# EAGLE board Schmatic (EAGLE 9.5.0), part 1 of 2
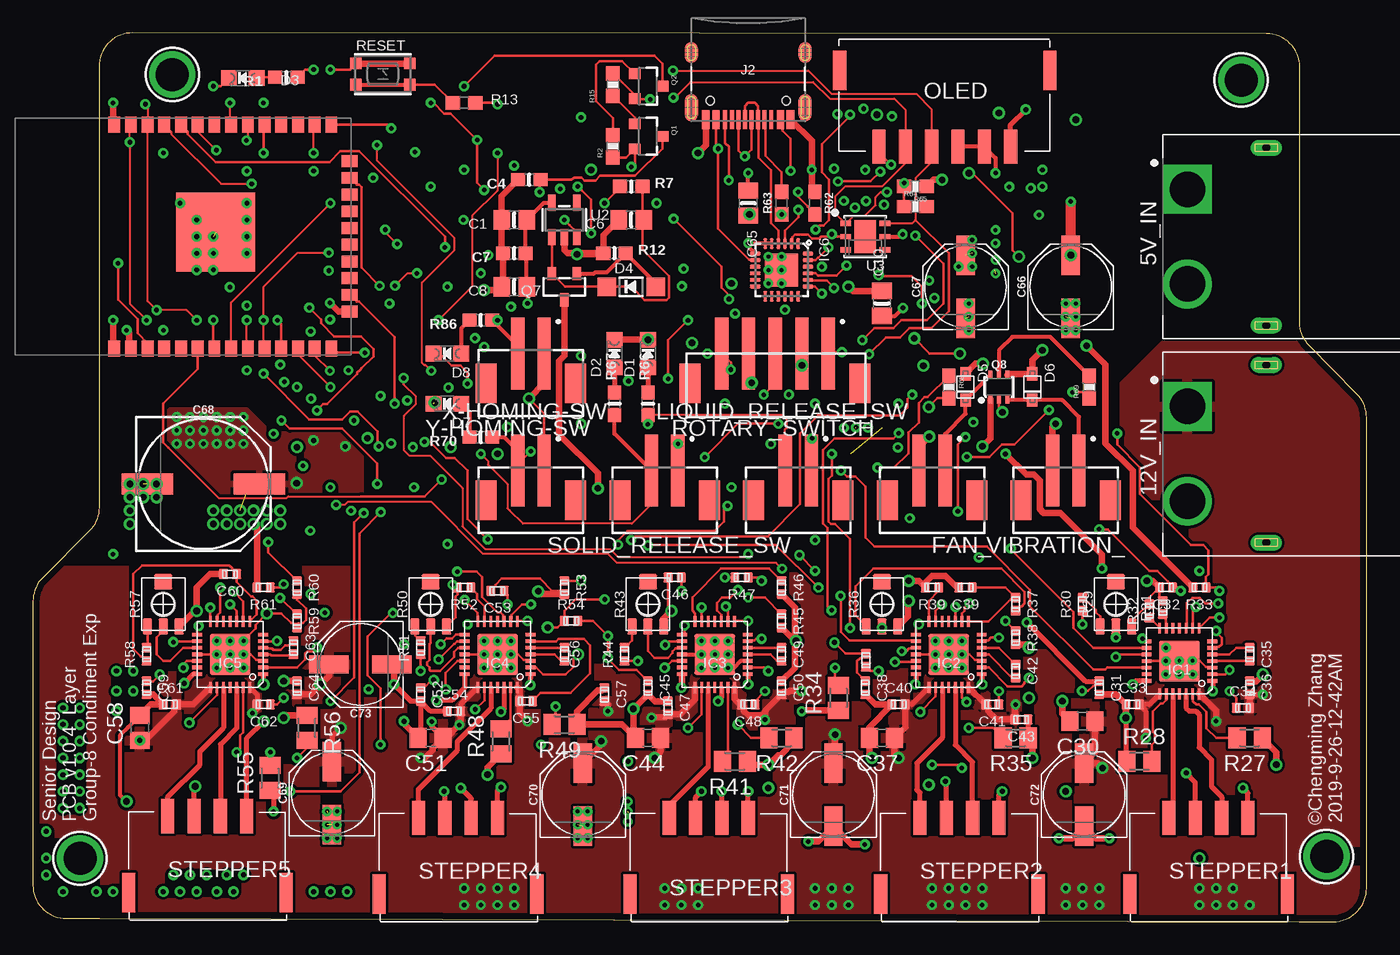
[diagram p0: board, top side]
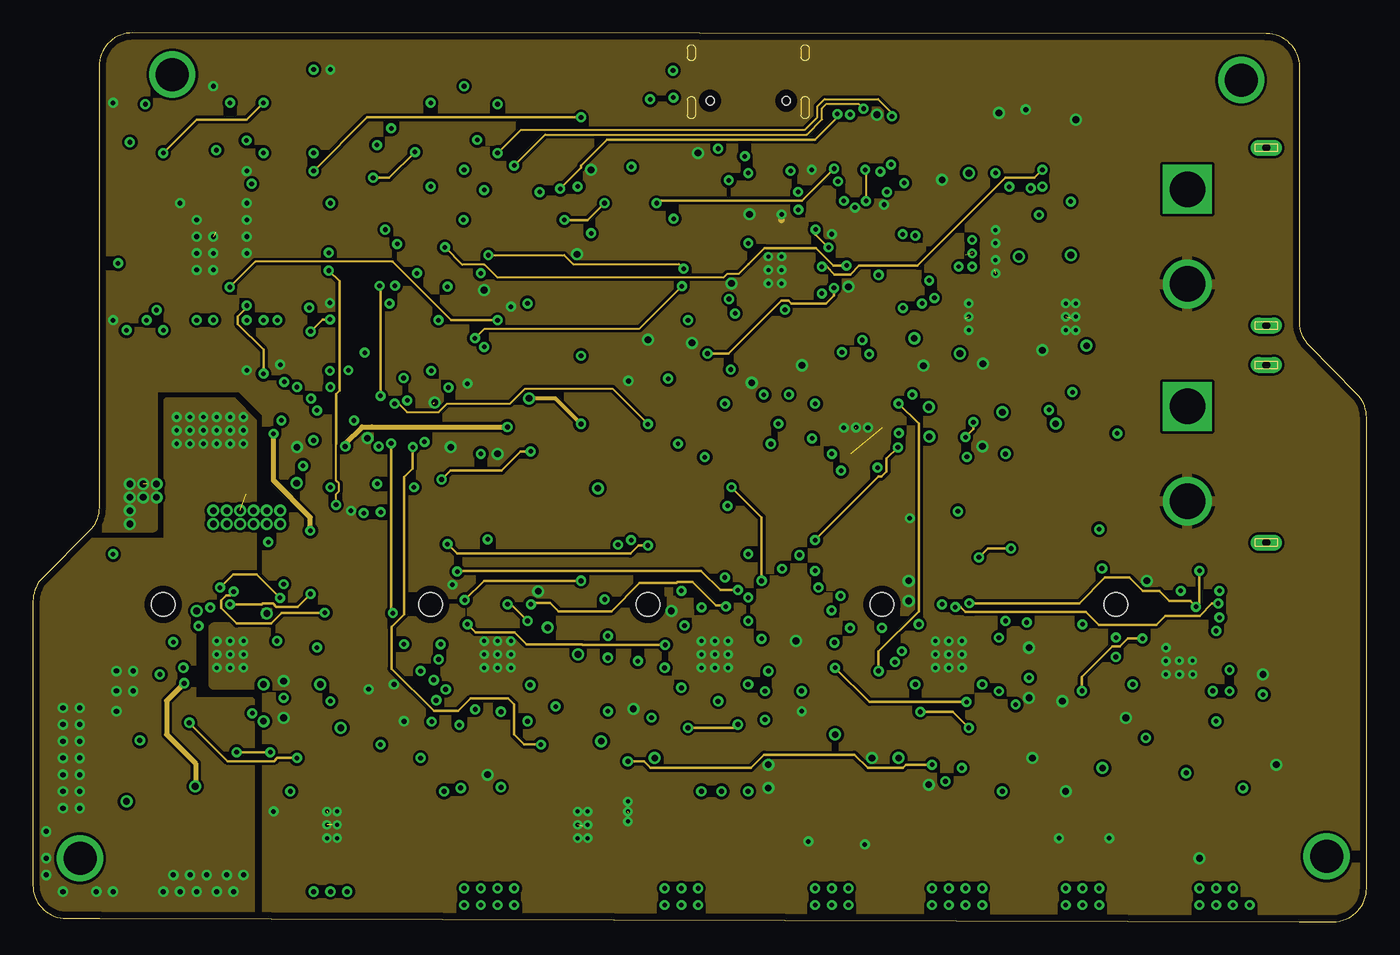
[diagram p1: board, inner layer GND]
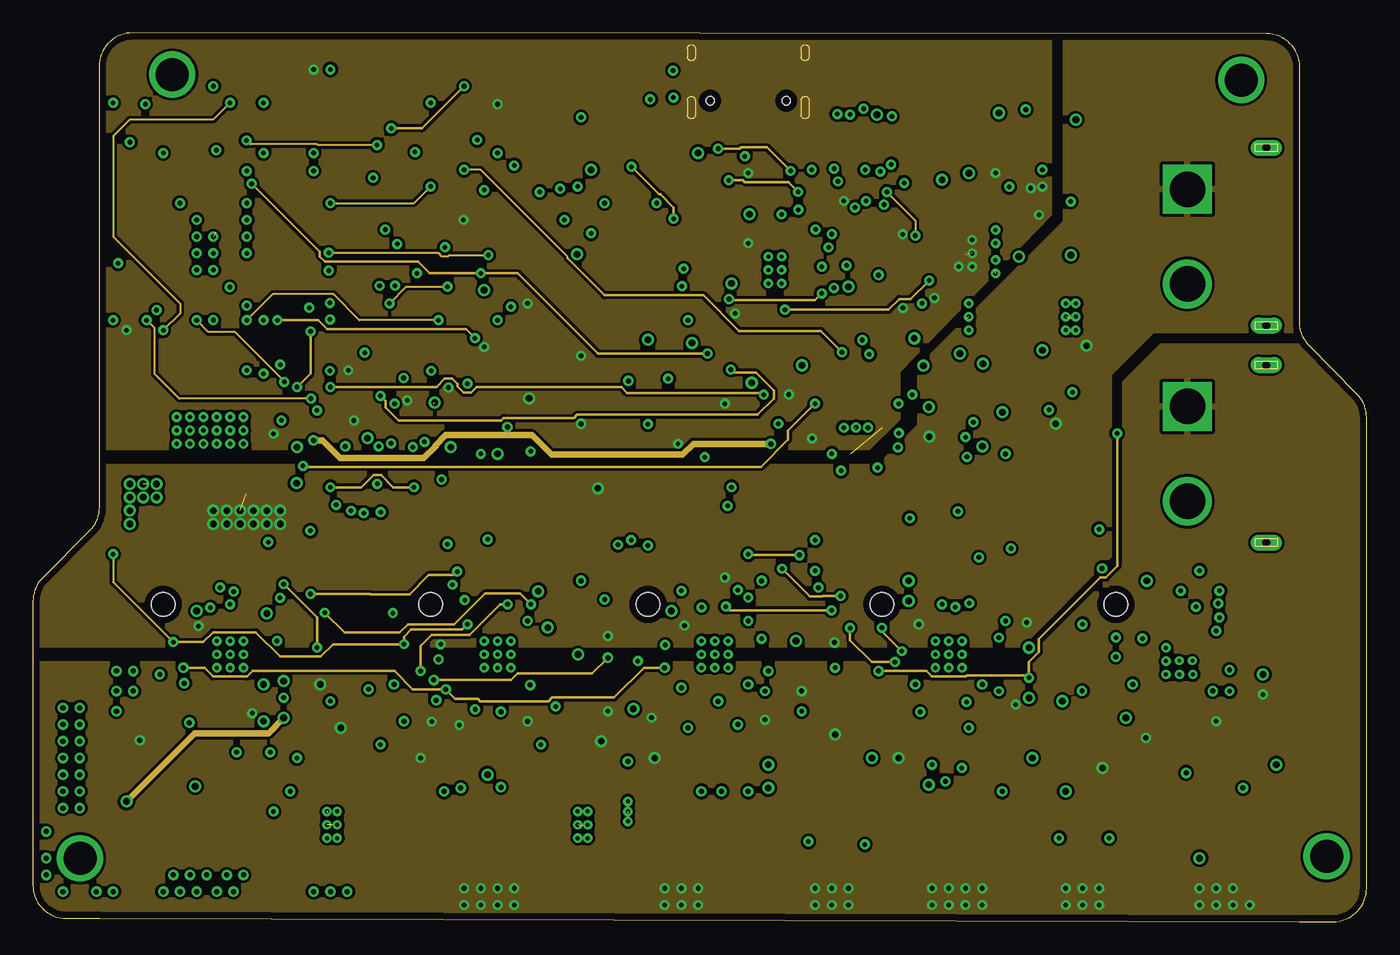
[diagram p2: board, inner layer Vref]
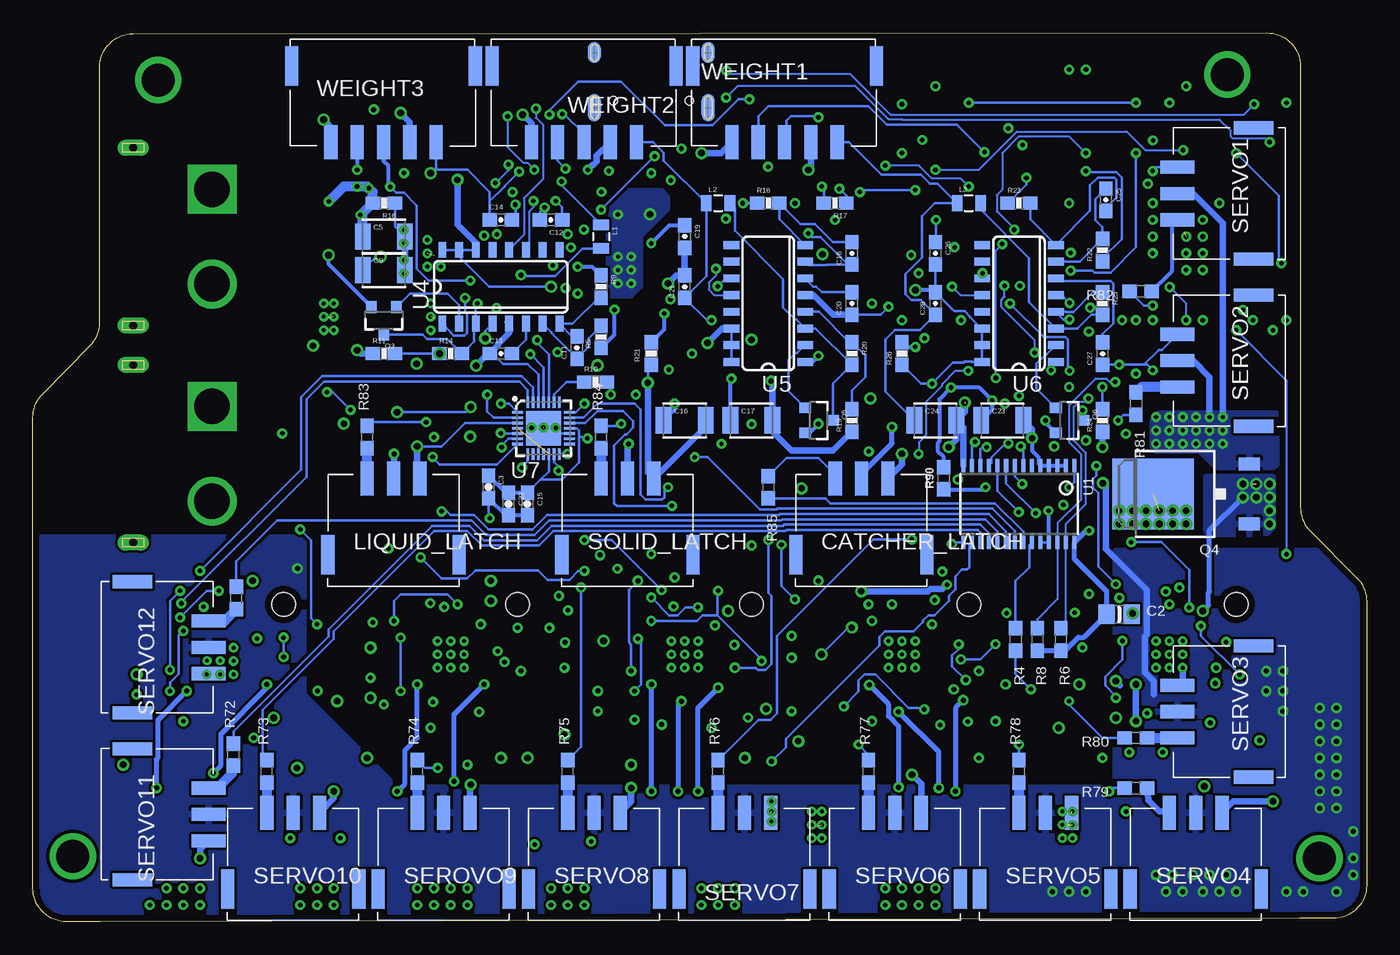
[diagram p3: board, bottom side, seen from below]

Size 101.35 x 67.55 mm. Coordinates in mm from the lower left corner, seen from the top.
Outline: 5.08,0.25 96.25,0 98.81,0 arc90 101.35,2.54 101.35,38.33 arc45 100.62,40.11 97,43.79 arc-43 96.27,45.52 96.27,45.55 96.29,59.69 96.27,64.96 arc90 93.73,67.49 7.57,67.55 arc90 5.03,65.01 5.03,31.47 arc-45 4.28,29.69 0.74,26.14 arc45 0,24.35 0,2.79 arc90 2.54,0.25 5.08,0.25
Copper layers (1+2*15+16): Top 0.035mm / dielectric 1.5mm / GND 0.035mm / dielectric 0.15mm / Vref 0.035mm / dielectric 0.2mm / Bottom 0.035mm
Design rules "default *": minimum track width 6mil, minimum drill 0.35mm, track to track 6mil, track to pad 6mil, pad to pad 6mil, via to via 6mil, smd to smd 6mil, copper to edge 20mil, drill to drill 6mil, minimum pad ring 10mil, minimum via ring 8mil, stop-mask expansion 4mil, vias tented up to drill 0mil, thermal gap 10mil
Net classes: 0 default: width 0.203 mm, drill 0.203 mm, clearance 0.203 mm; 1 sig: width 0.305 mm, drill 0.305 mm, clearance 0.203 mm; 2 Power: width 0.203 mm, drill 0.203 mm, clearance 0.203 mm; 3 HighSpeedSig: width 0.152 mm, drill 0.152 mm, clearance 0.203 mm; 4 StepperOut: width 0.381 mm, drill 0.381 mm, clearance 0.203 mm; 5 LowPower: width 0.203 mm, drill 0.203 mm, clearance 0.203 mm

## Footprints (pad centres in the part's own frame; a part is rotated, then mirrored left to right if it is on the bottom)
AMASS_XT60PW-M = drill 2.7 square: 1 -3.6,-6 | drill 2.7: 2 3.6,-6 | drill 0.6 pad 1.2 long: S1 -6.75,0; S2 6.75,0
0805-NO = smd 1.24 x 1.5: 1 -0.95,0; 2 0.95,0
0603-CAP = smd 1.1 x 1: 1 -0.85,0; 2 0.85,0
0603-NO = smd 1.075 x 1: 1 -0.85,0; 2 0.85,0
1210 = smd 1.2 x 2: 1 -1.6,0; 2 1.6,0
0603-CAP@1 = smd 1.1 x 1: 1 -0.85,0; 2 0.85,0
C0805 = smd 1.3 x 1.5: 1 -0.95,0; 2 0.95,0
C0402 = smd 0.75 x 0.7: 1 0,0.5; 2 0,-0.5
PANASONIC_D = smd 3 x 1.4: + 2.4,0; - -2.4,0
PANASONIC_G = smd 3.9 x 1.6: + 4.25,0; - -4.25,0
S3B-PH-SM4_TB = smd 1 x 2.6: 1 3.81,8.28; 2 5.81,8.28; 3 7.81,8.28 | smd 1 x 3: GND 0.826,2.48; GND2 10.794,2.48
CHIPLED_0805_NOOUTLINE = smd 1.2 x 1.2: A 0,-1.05; C 0,1.05
SOD-123 = smd 1.4 x 1.4: A 1.85,0; C -1.85,0
SOD-323F = smd 1 x 0.8: A -1,0; C 1,0
JST_B2B-PH-SM4-TB(LF)(SN) = smd 1 x 5.5: 1 -1,0; 2 1,0 | smd 1.6 x 3: 3 -3.4,2.25; 4 3.4,2.25
QFN28-PAD = smd 0.8 x 0.26: 1 -2.5,1.5; 2 -2.5,1; 3 -2.5,0.5; 4 -2.5,0; 5 -2.5,-0.5; 6 -2.5,-1; 7 -2.5,-1.5; 15 2.5,-1.5; 16 2.5,-1; 17 2.5,-0.5; 18 2.5,0; 19 2.5,0.5; 20 2.5,1; 21 2.5,1.5 | smd 0.26 x 0.8: 8 -1.5,-2.5; 9 -1,-2.5; 10 -0.5,-2.5; 11 0,-2.5; 12 0.5,-2.5; 13 1,-2.5; 14 1.5,-2.5; 22 1.5,2.5; 23 1,2.5; 24 0.5,2.5; 25 0,2.5; 26 -0.5,2.5; 27 -1,2.5; 28 -1.5,2.5 | smd 3.1 x 3.1: TP 0,0
QFN24_4MM_SMSC = smd 0.8 x 0.28: 1 -2,1.25; 2 -2,0.75; 3 -2,0.25; 4 -2,-0.25; 5 -2,-0.75; 6 -2,-1.25; 13 2,-1.25; 14 2,-0.75; 15 2,-0.25; 16 2,0.25; 17 2,0.75; 18 2,1.25 | smd 0.28 x 0.8: 7 -1.25,-2; 8 -0.75,-2; 9 -0.25,-2; 10 0.25,-2; 11 0.75,-2; 12 1.25,-2; 19 1.25,2; 20 0.75,2; 21 0.25,2; 22 -0.25,2; 23 -0.75,2; 24 -1.25,2 | smd 2.5 x 2.5: THERM 0,0
USB-C-16P = smd 0.3 x 1.45: A5 -1.25,0; A6 -0.25,0; A7 0.25,0; A8 1.25,0; B5 1.75,0; B6 0.75,0; B7 -0.75,0; B8 -1.75,0 | smd 0.6 x 1.45: GND -3.225,0; GND2 3.225,0 | smd 1 x 2.1: SHLD1 -4.32,-0.915; SHLD2 4.32,-0.915 | smd 1 x 2.1 bottom: SHLD3 -4.32,-0.915; SHLD4 4.32,-0.915 | smd 1 x 1.6: SHLD5 -4.32,-5.095; SHLD8 4.32,-5.095 | smd 1 x 1.6 bottom: SHLD6 -4.32,-5.095; SHLD7 4.32,-5.095 | smd 0.55 x 1.45: VBUS1 -2.45,0; VBUS2 2.45,0 | hole 0.65: -2.89,-1.445; 2.89,-1.445
0805 = smd 0.8 x 1.2: 1 -0.9,0; 2 0.9,0
S6B-PH-SM4_TB = smd 1 x 2.6: 1 5.46,9.68; 2 7.46,9.68; 3 9.46,9.68; 4 11.46,9.68; 5 13.46,9.68; 6 15.46,9.68 | smd 1 x 3: GND 2.476,3.88; GND2 18.444,3.88
SOT23-3 = smd 0.8 x 0.9: 1 -0.95,-1; 2 0.95,-1; 3 0,1.1
TO252 = smd 1 x 1.6: 1 -2.28,-4.8; 2 2.28,-4.8 | smd 5.4 x 6.2: 3 0,2.5
SOT23-R = smd 0.635 x 1.016: 1 -0.95,-1; 2 0.95,-1; 3 0,1
SC70-6 = smd 0.3 x 0.66: 1 -0.65,-0.92; 2 0,-0.92; 3 0.65,-0.92; 4 0.65,0.92; 5 0,0.92; 6 -0.65,0.92
0603-RES = smd 1.1 x 1: 1 -0.85,0; 2 0.85,0
0603 = smd 1.1 x 1: 1 -0.85,0; 2 0.85,0
0603-RES@1 = smd 1.1 x 1: 1 -0.85,0; 2 0.85,0
M0805 = smd 1.3 x 1.6: 1 -0.95,0; 2 0.95,0
POT_EVM3R = smd 0.7 x 1.2: 1 -1.2,-1.7; 2 0,-1.7; 3 1.2,-1.7 | smd 1.4 x 1.2: MOUNT 0,1.7 | hole 1.8: 0,0
BTN_KMR2_4.6X2.8 = smd 0.9 x 0.9: A 2.05,0.8; A' -2.05,0.8; B 2.05,-0.8; B' -2.05,-0.8
JST_B5B-PH-SM4-TB = smd 1 x 5.5: 1 4.08,3.81; 2 6.08,3.81; 5 8.112,3.81; 6 10.144,3.81; 7 12.176,3.81 | smd 1.6 x 3: 3 1.68,6.06; 4 14.576,6.06
S4B-PH-SM4_TB = smd 1 x 2.6: 1 3.27,7.9; 2 5.27,7.9; 3 7.27,7.9; 4 9.27,7.9 | smd 1 x 3: GND 0.286,2.1; GND2 12.254,2.1
TSSOP28 = smd 0.305 x 0.991: 1 -4.225,-2.918; 2 -3.575,-2.918; 3 -2.925,-2.918; 4 -2.275,-2.918; 5 -1.625,-2.918; 6 -0.975,-2.918; 7 -0.325,-2.918; 8 0.325,-2.918; 9 0.975,-2.918; 10 1.625,-2.918; 11 2.275,-2.918; 12 2.925,-2.918; 13 3.575,-2.918; 14 4.225,-2.918; 15 4.225,2.918; 16 3.575,2.918; 17 2.925,2.918; 18 2.275,2.918; 19 1.625,2.918; 20 0.975,2.918; 21 0.325,2.918; 22 -0.325,2.918; 23 -0.975,2.918; 24 -1.625,2.918; 25 -2.275,2.918; 26 -2.925,2.918; 27 -3.575,2.918; 28 -4.225,2.918
SOT23-5 = smd 0.55 x 1.2: 1 -0.95,-1.3; 2 0,-1.3; 3 0.95,-1.3; 4 0.95,1.3; 5 -0.95,1.3
HTU21DF = smd 0.8 x 0.4: 1 -1.5,1; 2 -1.5,0; 3 -1.5,-1; 4 1.5,-1; 5 1.5,0; 6 1.5,1 | smd 1.6 x 2.5: PAD 0,0
SO16 = smd 0.6 x 1.2: 1 -4.445,-2.8; 2 -3.175,-2.8; 3 -1.905,-2.8; 4 -0.635,-2.8; 5 0.635,-2.8; 6 1.905,-2.8; 7 3.175,-2.8; 8 4.445,-2.8; 9 4.445,2.8; 10 3.175,2.8; 11 1.905,2.8; 12 0.635,2.8; 13 -0.635,2.8; 14 -1.905,2.8; 15 -3.175,2.8; 16 -4.445,2.8
QFN-28 = smd 0.85 x 0.2: 1 -1.975,1.2; 2 -1.975,0.8; 3 -1.975,0.4; 4 -1.975,0; 5 -1.975,-0.4; 6 -1.975,-0.8; 7 -1.975,-1.2; 15 1.975,-1.2; 16 1.975,-0.8; 17 1.975,-0.4; 18 1.975,0; 19 1.975,0.4; 20 1.975,0.8; 21 1.975,1.2 | smd 0.2 x 0.85: 8 -1.2,-1.975; 9 -0.8,-1.975; 10 -0.4,-1.975; 11 0,-1.975; 12 0.4,-1.975; 13 0.8,-1.975; 14 1.2,-1.975; 22 1.2,1.975; 23 0.8,1.975; 24 0.4,1.975; 25 0,1.975; 26 -0.4,1.975; 27 -0.8,1.975; 28 -1.2,1.975 | smd 2.65 x 2.65: 29 0,0
MOUNTINGHOLE_2.5_PLATED = drill 2.5 pad 3.2: P$1 0,0
S5B-PH-SM4_TB = smd 1 x 2.6: 1 4.92,9.33; 2 6.92,9.33; 3 8.92,9.33; 4 10.92,9.33; 5 12.92,9.33 | smd 1 x 3: GND 1.936,3.53; GND2 15.904,3.53
WROOM32_SKINNY = smd 1.2 x 0.9: 1 -8.5,5; 2 -8.5,3.73; 3 -8.5,2.46; 4 -8.5,1.19; 5 -8.5,-0.08; 6 -8.5,-1.35; 7 -8.5,-2.62; 8 -8.5,-3.89; 9 -8.5,-5.16; 10 -8.5,-6.43; 11 -8.5,-7.7; 12 -8.5,-8.97; 13 -8.5,-10.24; 14 -8.5,-11.51; 25 8.5,-11.51; 26 8.5,-10.24; 27 8.5,-8.97; 28 8.5,-7.7; 29 8.5,-6.43; 30 8.5,-5.16; 31 8.5,-3.89; 32 8.5,-2.62; 33 8.5,-1.35; 34 8.5,-0.08; 35 8.5,1.19; 36 8.5,2.46; 37 8.5,3.73; 38 8.5,5 | smd 0.9 x 1.2: 15 -5.7,-12.9; 16 -4.43,-12.9; 17 -3.16,-12.9; 18 -1.89,-12.9; 19 -0.62,-12.9; 20 0.65,-12.9; 21 1.92,-12.9; 22 3.19,-12.9; 23 4.46,-12.9; 24 5.73,-12.9 | smd 6 x 6: P$1 0.34,-2.7

## Placement (x,y rotation side)
5V_IN  XT60PW-M  [AMASS_XT60PW-M]  93.73,52.07 270 top
12V_IN  XT60PW-M  [AMASS_XT60PW-M]  93.73,35.56 270 top
C1  10uF  [0805-NO]  36.58,53.34 180 top
C2  10uF  [0805-NO]  18.8,23.37 0 bottom
C3  0.1uF  [0603-CAP]  66.72,33.03 270 bottom
C4  1uF  [0603-NO]  37.72,56.39 180 top
C5  10uF  [1210]  74.68,52.07 0 bottom
C6  10µF  [0805-NO]  45.47,53.34 180 top
C7  1uF  [0603-NO]  36.58,50.8 180 top
C8  10µF  [0805-NO]  36.58,48.26 180 top
C9  10uF  [1210]  74.68,49.53 0 bottom
C10  0.1uF  [0805-NO]  64.52,46.99 90 top
C11  0.1uF  [0603-CAP@1]  60.01,43.63 90 bottom
C12  0.1uF  [0603-CAP@1]  61.98,53.34 180 bottom
C13  0.1uF  [0603-CAP@1]  65.79,43.18 0 bottom
C14  0.1uF  [0603-CAP@1]  65.79,53.34 0 bottom
C15  0.1uF  [0603-CAP]  63.77,31.75 270 bottom
C16  10uF  [1210]  51.82,38.1 0 bottom
C17  10uF  [1210]  46.74,38.1 0 bottom
C18  0.1uF  [0603-CAP@1]  39.12,50.8 90 bottom
C19  0.1uF  [0603-CAP@1]  51.82,52.07 270 bottom
C20  0.1uF  [0603-CAP@1]  39.12,46.99 90 bottom
C21  0.1uF  [0603-CAP@1]  51.82,48.26 90 bottom
C22  0.1uF  [0603-CAP]  65.21,31.76 270 bottom
C23  10uF  [1210]  27.69,38.1 0 bottom
C24  10uF  [1210]  32.77,38.1 0 bottom
C25  0.1uF  [0603-CAP@1]  19.81,54.86 270 bottom
C26  0.1uF  [0603-CAP@1]  32.77,50.8 270 bottom
C27  0.1uF  [0603-CAP@1]  20.07,43.18 90 bottom
C28  0.1uF  [0603-CAP@1]  32.77,46.99 90 bottom
C30  1u/50V  [C0805]  79.76,15.24 180 top
C31  100n/50V  [C0402]  81.03,17.78 180 top
C32  4u7/6V3  [C0402]  86.11,25.4 90 top
C33  100n/50V  [C0402]  83.57,16.51 270 top
C34  100n/50V  [C0402]  91.95,16.26 270 top
C35  22n/50V  [C0402]  92.46,20.32 180 top
C36  100n/50V  [C0402]  92.46,17.78 180 top
C37  1u/50V  [C0805]  64.52,13.97 180 top
C38  100n/50V  [C0402]  63.25,17.78 180 top
C39  4u7/6V3  [C0402]  70.87,25.4 90 top
C40  100n/50V  [C0402]  65.79,16.51 270 top
C41  100n/50V  [C0402]  72.9,16.51 90 top
C42  22n/50V  [C0402]  74.68,19.05 180 top
C43  100n/50V  [C0402]  75.1,15.36 90 top
C44  1u/50V  [C0805]  46.74,13.97 180 top
C45  100n/50V  [C0402]  46.74,17.78 180 top
C46  4u7/6V3  [C0402]  48.77,26.16 90 top
C47  100n/50V  [C0402]  48.26,16.26 180 top
C48  100n/50V  [C0402]  54.36,16.51 90 top
C49  22n/50V  [C0402]  56.9,20.32 180 top
C50  100n/50V  [C0402]  56.9,17.78 180 top
C51  1u/50V  [C0805]  30.23,13.97 180 top
C52  100n/50V  [C0402]  29.46,17.27 180 top
C53  4u7/6V3  [C0402]  35.31,25.15 90 top
C54  100n/50V  [C0402]  32,16 270 top
C55  100n/50V  [C0402]  37.47,16.76 90 top
C56  22n/50V  [C0402]  40.39,20.32 180 top
C57  100n/50V  [C0402]  43.43,17.27 180 top
C58  1u/50V  [C0805]  8.13,14.73 90 top
C59  100n/50V  [C0402]  8.64,17.78 180 top
C60  4u7/6V3  [C0402]  14.99,26.42 90 top
C61  100n/50V  [C0402]  10.41,16.51 270 top
C62  100n/50V  [C0402]  17.53,16.51 90 top
C63  22n/50V  [C0402]  19.81,20.83 180 top
C64  100n/50V  [C0402]  20.07,17.78 180 top
C65  10uF  [0805-NO]  54.36,54.61 270 top
C66  100uF  [PANASONIC_D]  78.87,48.26 90 top
C67  100uF  [PANASONIC_D]  70.87,48.26 90 top
C68  560uF  [PANASONIC_G]  12.95,33.27 0 top
C69  100uF  [PANASONIC_D]  22.73,9.78 90 top
C70  100uF  [PANASONIC_D]  41.78,9.65 90 top
C71  100uF  [PANASONIC_D]  60.83,9.65 90 top
C72  100uF  [PANASONIC_D]  79.88,9.65 90 top
C73  100uF  [PANASONIC_D]  24.89,19.56 180 top
CATCHER_LATCH  S3B-PH-SM4_TB  [S3B-PH-SM4_TB]  44.2,25.4 0 bottom
D1  RED  [CHIPLED_0805_NOOUTLINE]  46.74,43.18 0 top
D2  RED  [CHIPLED_0805_NOOUTLINE]  44.2,43.18 0 top
D3  POWER  [CHIPLED_0805_NOOUTLINE]  15.94,64.12 90 top
D4  MBR120  [SOD-123]  45.47,48.26 0 top
D5  [SOD-323F]  70.87,40.64 270 top
D6  [SOD-323F]  75.95,40.64 270 top
D7  RED  [CHIPLED_0805_NOOUTLINE]  31.5,39.37 90 top
D8  RED  [CHIPLED_0805_NOOUTLINE]  31.5,43.18 90 top
FAN_  B2B-PH-SM4-TB(LF)(SN)  [JST_B2B-PH-SM4-TB(LF)(SN)]  68.33,34.29 180 top
IC1  TMC2208  [QFN28-PAD]  87.12,19.81 180 top
IC2  TMC2208  [QFN28-PAD]  69.6,20.32 180 top
IC3  TMC2208  [QFN28-PAD]  51.82,20.32 180 top
IC4  TMC2208  [QFN28-PAD]  35.31,20.32 180 top
IC5  TMC2208  [QFN28-PAD]  14.99,20.32 180 top
IC6  CP2104  [QFN24_4MM_SMSC]  56.9,49.53 270 top
J2  [USB-C-16P]  54.36,60.96 180 top
L1  3.3uH  [0805]  58.17,52.07 270 bottom
L2  3.3uH  [0805]  49.28,54.61 0 bottom
L3  3.3uH  [0805]  30.23,54.61 0 bottom
LIQUID_LATCH  S3B-PH-SM4_TB  [S3B-PH-SM4_TB]  79.76,25.4 0 bottom
LIQUID_RELEASE_SW  B2B-PH-SM4-TB(LF)(SN)  [JST_B2B-PH-SM4-TB(LF)(SN)]  58.17,34.29 180 top
OLED  S6B-PH-SM4_TB  [S6B-PH-SM4_TB]  79.76,68.58 180 top
Q1  mmbt2222  [SOT23-3]  46.74,59.69 270 top
Q2  mmbt2222  [SOT23-3]  46.74,63.5 270 top
Q3  MMBT4403  [SOT23-3]  74.68,45.72 180 bottom
Q4  AOD417  [TO252]  13.72,32.51 90 bottom
Q5  MMBT4403  [SOT23-3]  41.66,38.1 270 bottom
Q6  MMBT4403  [SOT23-3]  22.61,38.1 270 bottom
Q7  DMG3415U  [SOT23-R]  40.39,48.26 180 top
Q8  [SC70-6]  73.41,40.64 0 top
R1  1K  [0603-NO]  19.26,64.18 180 top
R2  10K  [0603-RES]  44.07,58.93 90 top
R4  10k  [0603]  26.67,21.46 270 bottom
R5  100  [0603-RES@1]  58.17,44.45 90 bottom
R6  10k  [0603]  23.24,21.46 270 bottom
R7  100K  [0603-NO]  45.47,55.88 0 top
R8  10k  [0603]  25.02,21.46 270 bottom
R9  100  [0603-RES@1]  58.17,48.26 270 bottom
R10  10K  [0603-RES]  58.58,41.02 0 bottom
R11  8.2K  [0603-RES@1]  74.68,43.18 0 bottom
R12  100K  [0603-NO]  44.2,50.8 0 top
R13  10k  [0603]  32.77,62.23 0 top
R14  20k  [0603-RES@1]  69.6,43.18 0 bottom
R15  10K  [0603-RES]  44.07,63.63 270 top
R16  10K  [0603-RES]  74.68,54.61 180 bottom
R17  100  [0603-RES@1]  40.39,54.61 180 bottom
R18  100  [0603-RES@1]  45.47,54.61 0 bottom
R19  8.2K  [0603-RES@1]  39.12,38.1 90 bottom
R20  20k  [0603-RES@1]  39.12,43.18 270 bottom
R21  10K  [0603-RES]  54.36,43.18 90 bottom
R22  100  [0603-RES@1]  20.07,51.05 90 bottom
R23  100  [0603-RES@1]  26.42,54.61 0 bottom
R24  8.2K  [0603-RES@1]  20.07,38.1 90 bottom
R25  20k  [0603-RES@1]  20.07,46.99 270 bottom
R26  10K  [0603-RES]  35.31,43.18 90 bottom
R27  R0805/0R11  [M0805]  92.46,13.97 180 top
R28  R0805/0R11  [M0805]  84.07,12.19 0 top
R29  20k  [POT_EVM3R]  82.3,24.13 0 top
R30  20k  [C0402]  79.76,24.13 0 top
R31  20k  [C0402]  85.85,23.88 0 top
R32  20k  [C0402]  84.84,23.62 0 top
R33  20k  [C0402]  88.65,25.4 90 top
R34  R0805/0R11  [M0805]  61.21,17.02 90 top
R35  R0805/0R11  [M0805]  74.68,13.97 180 top
R36  20k  [POT_EVM3R]  64.52,24.13 0 top
R37  20k  [C0402]  74.68,24.13 180 top
R38  20k  [C0402]  74.68,21.59 180 top
R39  20k  [C0402]  68.33,25.4 90 top
R40  20k  [C0402]  63.3,19.88 0 top
R41  R0805/0R11  [M0805]  53.34,12.19 180 top
R42  R0805/0R11  [M0805]  56.9,13.97 180 top
R43  20k  [POT_EVM3R]  46.74,24.13 0 top
R44  20k  [C0402]  44.96,20.32 0 top
R45  20k  [C0402]  56.9,22.86 180 top
R46  20k  [C0402]  56.9,25.4 180 top
R47  20k  [C0402]  53.85,26.16 90 top
R48  R0805/0R11  [M0805]  35.56,13.72 90 top
R49  R0805/0R11  [M0805]  40.39,14.99 180 top
R50  20k  [POT_EVM3R]  30.23,24.13 0 top
R51  20k  [C0402]  29.46,20.83 0 top
R52  20k  [C0402]  32.77,25.4 90 top
R53  20k  [C0402]  40.39,25.4 180 top
R54  20k  [C0402]  40.89,22.86 270 top
R55  R0805/0R11  [M0805]  18.03,10.92 90 top
R56  R0805/0R11  [M0805]  20.83,14.73 270 top
R57  20k  [POT_EVM3R]  9.91,24.13 0 top
R58  20k  [C0402]  8.64,20.32 0 top
R59  20k  [C0402]  20.07,22.86 180 top
R60  20k  [C0402]  20.07,25.4 180 top
R61  20k  [C0402]  17.53,25.4 90 top
R62  5.1k  [0603]  59.44,54.61 270 top
R63  5.1k  [0603]  56.9,54.61 90 top
R64  10K  [0603-RES]  67.06,54.36 0 top
R65  10K  [0603-RES]  67.06,55.88 180 top
R66  1K  [0603-NO]  46.74,39.37 90 top
R67  1K  [0603-NO]  44.2,39.37 90 top
R68  10K  [0603-RES]  69.6,40.64 270 top
R69  10K  [0603-RES]  80.26,40.64 90 top
R70  1K  [0603-NO]  34.04,36.83 180 top
R71  22  [0603]  85.88,24.6 90 bottom
R72  22  [0603]  86.11,12.7 90 bottom
R73  22  [0603]  83.57,11.43 90 bottom
R74  22  [0603]  72.14,11.43 90 bottom
R75  22  [0603]  60.71,11.43 90 bottom
R76  22  [0603]  49.28,11.43 90 bottom
R77  22  [0603]  37.85,11.43 90 bottom
R78  22  [0603]  26.42,11.43 90 bottom
R79  22  [0603]  17.53,10.16 180 bottom
R80  22  [0603]  17.53,13.97 180 bottom
R81  22  [0603]  17.53,39.37 270 bottom
R82  22  [0603]  17.17,47.91 180 bottom
R83  22  [0603]  75.95,36.83 90 bottom
R84  22  [0603]  58.17,36.83 90 bottom
R85  22  [0603]  45.47,33.02 270 bottom
R86  1K  [0603-NO]  34.04,45.72 180 top
R90  10k  [0603]  32.13,33.71 90 bottom
RESET  KMR2  [BTN_KMR2_4.6X2.8]  26.59,64.42 0 top
ROTARY_SWITCH  B5B-PH-SM4-TB  [JST_B5B-PH-SM4-TB]  64.52,46.99 180 top
SEROVO9  S3B-PH-SM4_TB  [S3B-PH-SM4_TB]  75.95,0 0 bottom
SERVO1  S3B-PH-SM4_TB  [S3B-PH-SM4_TB]  6.1,49.53 90 bottom
SERVO2  S3B-PH-SM4_TB  [S3B-PH-SM4_TB]  6.1,36.83 90 bottom
SERVO3  S3B-PH-SM4_TB  [S3B-PH-SM4_TB]  6.1,10.16 90 bottom
SERVO4  S3B-PH-SM4_TB  [S3B-PH-SM4_TB]  18.8,0 0 bottom
SERVO5  S3B-PH-SM4_TB  [S3B-PH-SM4_TB]  30.23,0 0 bottom
SERVO6  S3B-PH-SM4_TB  [S3B-PH-SM4_TB]  41.66,0 0 bottom
SERVO7  S3B-PH-SM4_TB  [S3B-PH-SM4_TB]  53.09,0 0 bottom
SERVO8  S3B-PH-SM4_TB  [S3B-PH-SM4_TB]  64.52,0 0 bottom
SERVO10  S3B-PH-SM4_TB  [S3B-PH-SM4_TB]  87.38,0 0 bottom
SERVO11  S3B-PH-SM4_TB  [S3B-PH-SM4_TB]  96.27,13.97 270 bottom
SERVO12  S3B-PH-SM4_TB  [S3B-PH-SM4_TB]  96.27,26.67 270 bottom
SOLID_LATCH  S3B-PH-SM4_TB  [S3B-PH-SM4_TB]  61.98,25.4 0 bottom
SOLID_RELEASE_SW  B2B-PH-SM4-TB(LF)(SN)  [JST_B2B-PH-SM4-TB(LF)(SN)]  48.01,34.29 180 top
STEPPER1  S4B-PH-SM4_TB  [S4B-PH-SM4_TB]  83.06,0 0 top
STEPPER2  S4B-PH-SM4_TB  [S4B-PH-SM4_TB]  64.14,0 0 top
STEPPER3  S4B-PH-SM4_TB  [S4B-PH-SM4_TB]  45.08,0 0 top
STEPPER4  S4B-PH-SM4_TB  [S4B-PH-SM4_TB]  26.04,0 0 top
STEPPER5  S4B-PH-SM4_TB  [S4B-PH-SM4_TB]  6.99,0.13 0 top
U1  PCA9685  [TSSOP28]  26.42,31.75 180 bottom
U2  AP2112-3.3  [SOT23-5]  40.39,53.34 0 top
U3  HTU21DF  [HTU21DF]  63.25,52.07 180 top
U4  HX711  [SO16]  65.79,48.26 0 bottom
U5  HX711  [SO16]  45.47,46.99 90 bottom
U6  HX711  [SO16]  26.42,46.99 90 bottom
U7  SX1509  [QFN-28]  62.54,37.51 0 bottom
U$4  MOUNTINGHOLE2.5  [MOUNTINGHOLE_2.5_PLATED]  3.58,4.82 0 top
U$48  MOUNTINGHOLE2.5  [MOUNTINGHOLE_2.5_PLATED]  98.31,4.97 0 top
U$49  MOUNTINGHOLE2.5  [MOUNTINGHOLE_2.5_PLATED]  10.59,64.39 0 top
U$50  MOUNTINGHOLE2.5  [MOUNTINGHOLE_2.5_PLATED]  91.82,63.97 0 top
VIBRATION_  B2B-PH-SM4-TB(LF)(SN)  [JST_B2B-PH-SM4-TB(LF)(SN)]  78.49,34.29 180 top
WEIGHT1  S5B-PH-SM4_TB  [S5B-PH-SM4_TB]  35.31,68.58 180 bottom
WEIGHT2  S5B-PH-SM4_TB  [S5B-PH-SM4_TB]  50.55,68.58 180 bottom
WEIGHT3  S5B-PH-SM4_TB  [S5B-PH-SM4_TB]  65.79,68.58 180 bottom
X2  ESP32_WROOM32_SKINNY  [WROOM32_SKINNY]  11.18,52.07 90 top
X-HOMING-SW  B2B-PH-SM4-TB(LF)(SN)  [JST_B2B-PH-SM4-TB(LF)(SN)]  37.85,34.29 180 top
Y-HOMING-SW  B2B-PH-SM4-TB(LF)(SN)  [JST_B2B-PH-SM4-TB(LF)(SN)]  37.85,43.18 180 top

## Library data of the parts
5V_IN 12V_IN = XT60PW-M; AVAILABILITY: Unavailable; MF: AMASS; MP: XT60PW-M; PACKAGE: Package Analog Devices; PRICE: None
C1 C2 C4 C6-C8 C10 C65 D1-D4 D7 D8 IC6 Q4 Q7 R1 R7 R12 R66 R67 R70 R86 RESET U1-U3 X2 = microbuilder
C3 C15 C22 = SparkFun-Capacitors; PROD_ID: CAP-00810
C5 C9 C16 C17 C23 C24 = SparkFun-Capacitors; PROD_ID: CAP-09824
C11-C14 C18-C21 C25-C28 = SparkFun-Capacitors; PROD_ID: CAP-08604
C30 C37 C44 C51 C58 R27 R28 R34 R35 R41 R42 R48 R49 R55 R56 = rcl
C31-C36 C38-C43 C45-C50 C52-C57 C59-C64 R29-R33 R36-R40 R43-R47 R50-R54 R57-R61 = we-rcl
C66 C67 C69-C73 = SparkFun-Capacitors; PROD_ID: CAP-12547
C68 = SparkFun-Capacitors; PROD_ID: CAP-09983
CATCHER_LATCH LIQUID_LATCH OLED SEROVO9 SERVO1-SERVO8 SERVO10-SERVO12 SOLID_LATCH STEPPER1-STEPPER5 WEIGHT1-WEIGHT3 = NewKevinMade
D5 D6 = adafruit
FAN_ LIQUID_RELEASE_SW SOLID_RELEASE_SW VIBRATION_ X-HOMING-SW Y-HOMING-SW = B2B-PH-SM4-TB_LF__SN_; AVAILABILITY: Unavailable; DESCRIPTION: PH Series 2 Position 2 mm Pitch Surface Mount Top Entry Shrouded Header; MF: JST Sales; MP: B2B-PH-SM4-TB_LF__SN_; PACKAGE: None; PRICE: None
IC1-IC5 = we-chip
J2 = SparkFun-Connectors; PROD_ID: CONN-14122
L1-L3 = SparkFun-Passives; PROD_ID: NDUC-13076
Q1 Q2 = SparkFun
Q3 Q5 Q6 = SparkFun-DiscreteSemi; PROD_ID: TRANS-09245
Q8 = SparkFun-DiscreteSemi; PROD_ID: TRANS-13337
R2 R4 R6 R8 R10 R13 R15 R16 R21 R26 R64 R65 R68 R69 R90 = SparkFun-Resistors; PROD_ID: RES-00824
R5 R9 R17 R18 R22 R23 = SparkFun-Resistors; PROD_ID: RES-07863
R11 R19 R24 = SparkFun-Resistors; PROD_ID: RES-10646
R14 R20 R25 = SparkFun-Resistors; PROD_ID: RES-09383
R62 R63 = SparkFun-Resistors; PROD_ID: RES-12083
R71-R85 = SparkFun-Resistors; PROD_ID: RES-08698
ROTARY_SWITCH = B2B-PH-SM4-TB_LF__SN_
U4-U6 = Testing; PROD_ID: IC-12445
U7 = SparkFun-DigitalIC; PROD_ID: IC-11311
U$4 U$48-U$50 = microbuilder; BOM: EXCLUDE

## Nets
2RX [HighSpeedSig]: X2.27
2TX [HighSpeedSig]: X2.28
5V_REG [Power]: 5V_IN.1 C31.2 C38.2 C45.2 C52.2 C59.2 FAN_.2 IC1.15 IC2.15 IC3.15 IC4.15 IC5.15 Q4.3 Q7.3 R33.1 R40.1 R47.1 R54.1 R61.1 VIBRATION_.2
5V_SERVO [Power]: C68.+ CATCHER_LATCH.2 LIQUID_LATCH.2 Q4.2 SEROVO9.2 SERVO1.2 SERVO2.2 SERVO3.2 SERVO4.2 SERVO5.2 SERVO6.2 SERVO7.2 SERVO8.2 SERVO10.2 SERVO11.2 SERVO12.2 SOLID_LATCH.2
10: U7.15
11: U7.16
12V_REG [Power]: 12V_IN.1 C30.1 C33.1 C34.1 C36.1 C37.1 C40.1 C41.1 C43.1 C44.1 C47.1 C48.1 C50.1 C51.1 C54.1 C55.1 C57.1 C58.1 C61.1 C62.1 C64.1 C69.+ C70.+ C71.+ C72.+ C73.+ IC1.22 IC1.28 IC2.22 IC2.28 IC3.22 IC3.28 IC4.22 IC4.28 IC5.22 IC5.28
15: U7.22
!INT: U7.9
!RESET: R10.1 U7.23
A3_I39: X2.5
A4_IO36: X2.4
A+_1: R9.1 WEIGHT3.4
A+_2: R18.1 WEIGHT2.4
A+_3: R23.1 WEIGHT1.4
A-_1: R5.1 WEIGHT3.3
A-_2: R17.1 WEIGHT2.3
A-_3: R22.1 WEIGHT1.3
AVDD_1: C9.1 C14.1 L1.1 WEIGHT3.1
AVDD_2: C17.1 C21.1 L2.1 WEIGHT2.1
AVDD_3: C24.1 C28.1 L3.1 WEIGHT1.1
BRA: IC1.23 R28.2
BRA1: IC2.23 R35.2
BRA2: IC3.23 R42.2
BRA3: IC4.23 R49.2
BRA4: IC5.23 R56.2
BRB: IC1.27 R27.2
BRB1: IC2.27 R34.2
BRB2: IC3.27 R41.2
BRB3: IC4.27 R48.2
BRB4: IC5.27 R55.2
CC1: J2.A5 R63.2
CC2: J2.B5 R62.2
CLK_1: IC1.13 R31.2
CLK_2: IC2.13 R38.2
CLK_3: IC3.13 R45.2
CLK_4: IC4.13 R52.2
CLK_5: IC5.13 R59.2
CPI: C35.2 IC1.5
CPI1: C42.2 IC2.5
CPI2: C49.2 IC3.5
CPI3: C56.2 IC4.5
CPI4: C63.2 IC5.5
CPO: C35.1 IC1.4
CPO1: C42.1 IC2.4
CPO2: C49.1 IC3.4
CPO3: C56.1 IC4.4
CPO4: C63.1 IC5.4
DIR_1: IC1.19 U7.13
DIR_2: IC2.19 U7.14
DIR_LIQUID: IC3.19 IC4.19 IC5.19 U7.2
DTR: IC6.23 Q2.2 R15.1
EN: R7.1 U2.3
EN_LIQUID_1: IC3.2 R47.2 U7.20
EN_LIQUID_2: IC5.2 R61.2 U7.21
EN_LIQUID_3: IC4.2 R54.2 U7.19
EN_XY: IC1.2 IC2.2 R33.2 R40.2 U7.1
FAN: R68.1 U7.8
FAN_5V [LowPower]: D5.C FAN_.1 Q8.6
GND [Power]: 5V_IN.2 12V_IN.2 C1.2 C2.2 C3.2 C4.2 C5.2 C6.2 C7.2 C8.2 C9.2 C10.2 C12.2 C13.1 C14.2 C15.2 C16.2 C17.2 C19.2 C20.1 C21.2 C22.2 C23.2 C24.2 C26.2 C27.1 C28.2 C30.2 C31.1 C32.1 C33.2 C36.2 C37.2 C38.1 C39.1 C40.2 C43.2 C44.2 C45.1 C46.1 C47.2 C50.2 C51.2 C52.1 C53.1 C54.2 C57.2 C58.2 C59.1 C60.1 C61.2 C64.2 C65.2 C66.- C67.- C68.- C69.- C70.- C71.- C72.- C73.- CATCHER_LATCH.3 D1.C D2.C D3.C D5.A D6.A D7.C D8.C IC1.3 IC1.18 IC1.TP IC2.3 IC2.18 IC2.TP IC3.3 IC3.18 IC3.TP IC4.3 IC4.18 IC4.TP IC5.3 IC5.18 IC5.TP IC6.2 IC6.THERM J2.GND J2.GND2 LIQUID_LATCH.3 OLED.1 Q4.1 Q8.1 Q8.4 R4.2 R11.1 R12.1 R16.1 R19.1 R21.1 R24.1 R26.1 R27.1 R28.1 R29.3 R31.1 R32.1 R34.1 R35.1 R36.3 R38.1 R39.1 R41.1 R42.1 R43.3 R45.1 R46.1 R48.1 R49.1 R50.3 R52.1 R53.1 R55.1 R56.1 R57.3 R59.1 R60.1 R62.1 R63.1 R65.1 RESET.A RESET.A' ROTARY_SWITCH.2 ROTARY_SWITCH.6 SEROVO9.3 SERVO1.3 SERVO2.3 SERVO3.3 SERVO4.3 SERVO5.3 SERVO6.3 SERVO7.3 SERVO8.3 SERVO10.3 SERVO11.3 SERVO12.3 SOLID_LATCH.3 U1.2 U1.3 U1.4 U1.5 U1.14 U1.24 U1.25 U2.2 U3.5 U4.5 U4.14 U4.15 U4.16 U5.5 U5.14 U5.15 U5.16 U6.5 U6.14 U6.15 U6.16 U7.3 U7.10 U7.17 U7.26 U7.29 WEIGHT1.2 WEIGHT1.5 WEIGHT2.2 WEIGHT2.5 WEIGHT3.2 WEIGHT3.5 X2.1 X2.15 X2.38 X2.P$1
GPIO0: Q2.3 X2.25
GPIO2: X2.24
LRSW [HighSpeedSig]: LIQUID_RELEASE_SW.2 R66.1 X2.16
MS1_LIQUID: IC3.9 IC4.9 IC5.9 U7.5
MS1_SOLID: IC1.9 IC2.9 U7.27
MS2_LIQUID: IC3.10 IC4.10 IC5.10 U7.6
MS2_SOLID: IC1.10 IC2.10 U7.28
N$1: C13.2 U4.6
N$2: L1.2 Q3.3 R14.2 U4.3
N$3: Q5.1 U5.2
N$4: Q3.1 U4.2
N$5: D3.A R1.2
N$6: R11.2 R14.1 U4.4
N$7: C6.1 D4.C Q7.2 R7.2 U2.1
N$8: C11.1 R5.2 U4.7
N$9: C11.2 R9.2 U4.8
N$11: R19.2 R20.1 U5.4
N$12: Q1.1 R15.2
N$13: Q2.1 R2.2
N$14: C20.2 U5.6
N$15: L2.2 Q5.3 R20.2 U5.3
N$16: C18.1 R17.2 U5.7
N$17: C18.2 R18.2 U5.8
N$19: Q6.1 U6.2
N$20: R24.2 R25.1 U6.4
N$21: C27.2 U6.6
N$22: L3.2 Q6.3 R25.2 U6.3
N$23: C25.1 R22.2 U6.7
N$24: C25.2 R23.2 U6.8
N$26: IC6.8 J2.VBUS1 J2.VBUS2
N$27: IC6.3 J2.A6 J2.B6
N$28: IC6.4 J2.A7 J2.B7
N$30 [Power]: R90.1 U1.1
N$33 [sig]: D1.A R66.2
N$34: OLED.6 R64.1 R65.2
N$35: Q8.5 R69.2
N$36 [sig]: D2.A R67.2
N$37: Q8.2 R68.2
N$38: R71.2 U1.19
N$39: R72.2 U1.18
N$40: R73.2 U1.17
N$41: R74.2 U1.16
N$42: R75.2 U1.15
N$43: R76.2 U1.13
N$44: R77.2 U1.12
N$45: R78.2 U1.11
N$46: R79.2 U1.10
N$47: R80.2 U1.9
N$48: R81.2 U1.8
N$49: R82.2 U1.7
N$50: R83.2 U1.20
N$51: R84.2 U1.21
N$52: R85.2 U1.22
N$53 [sig]: D7.A R70.2
N$54: R13.1 RESET.B RESET.B'
N$55 [sig]: D8.A R86.2
OA1_1 [StepperOut]: IC1.24 STEPPER1.1
OA1_2 [StepperOut]: IC2.24 STEPPER2.1
OA1_3 [StepperOut]: IC3.24 STEPPER3.1
OA1_4 [StepperOut]: IC4.24 STEPPER4.1
OA1_5 [StepperOut]: IC5.24 STEPPER5.1
OA2_1 [StepperOut]: IC1.21 STEPPER1.2
OA2_2 [StepperOut]: IC2.21 STEPPER2.2
OA2_3 [StepperOut]: IC3.21 STEPPER3.2
OA2_4 [StepperOut]: IC4.21 STEPPER4.2
OA2_5 [StepperOut]: IC5.21 STEPPER5.2
OB1_1 [StepperOut]: IC1.26 STEPPER1.3
OB1_2 [StepperOut]: IC2.26 STEPPER2.3
OB1_3 [StepperOut]: IC3.26 STEPPER3.3
OB1_4 [StepperOut]: IC4.26 STEPPER4.3
OB1_5 [StepperOut]: IC5.26 STEPPER5.3
OB2_1 [StepperOut]: IC1.1 STEPPER1.4
OB2_2 [StepperOut]: IC2.1 STEPPER2.4
OB2_3 [StepperOut]: IC3.1 STEPPER3.4
OB2_4 [StepperOut]: IC4.1 STEPPER4.4
OB2_5 [StepperOut]: IC5.1 STEPPER5.4
OE: R4.1 U1.23
OLED_RST: R64.2
OSCIO: U7.11
PDN_UART_1: IC1.14 R32.2
PDN_UART_2: IC2.14 R39.2
PDN_UART_3: IC3.14 R46.2
PDN_UART_4: IC4.14 R53.2
PDN_UART_5: IC5.14 R60.2
PWM1: R82.1 SERVO1.1
PWM2: R81.1 SERVO2.1
PWM3: R80.1 SERVO3.1
PWM4: R79.1 SERVO4.1
PWM5: R78.1 SERVO5.1
PWM6: R77.1 SERVO6.1
PWM7: R76.1 SERVO7.1
PWM8: R75.1 SERVO8.1
PWM9: R74.1 SEROVO9.1
PWM10: R73.1 SERVO10.1
PWM11: R72.1 SERVO11.1
PWM12: R71.1 SERVO12.1
PWM13: LIQUID_LATCH.1 R83.1
PWM14: R84.1 SOLID_LATCH.1
PWM15: CATCHER_LATCH.1 R85.1
RESET: C4.1 Q1.3 X2.3
ROTA_A [HighSpeedSig]: ROTARY_SWITCH.1 X2.33
ROTA_C [HighSpeedSig]: ROTARY_SWITCH.5 X2.12
ROTA_E [HighSpeedSig]: ROTARY_SWITCH.7 X2.23
RTS: IC6.19 Q1.2 R2.1
RXD0 [HighSpeedSig]: IC6.21 X2.34
SCL [HighSpeedSig]: OLED.4 R8.1 U1.26 U3.3 U7.25 X2.36
SDA [HighSpeedSig]: OLED.5 R6.1 U1.27 U3.4 U7.24 X2.37
SRSW [HighSpeedSig]: R67.1 SOLID_RELEASE_SW.2 X2.30
STEP_1 [HighSpeedSig]: IC1.16 X2.26
STEP_2 [HighSpeedSig]: IC2.16 X2.29
STEP_LIQUID [HighSpeedSig]: IC3.16 IC4.16 IC5.16 X2.31
TRI_5V_1: C32.2 IC1.8 R30.2
TRI_5V_2: C39.2 IC2.8 R37.2
TRI_5V_3: C46.2 IC3.8 R44.2
TRI_5V_4: C53.2 IC4.8 R51.2
TRI_5V_5: C60.2 IC5.8 R58.2
TXD0 [HighSpeedSig]: IC6.20 X2.35
VBUS [LowPower]: D4.A Q7.1 R12.2
VCC [LowPower]: C1.1 C2.1 C3.1 C5.1 C7.1 C8.1 C10.1 C12.1 C15.1 C16.1 C19.1 C22.1 C23.1 C26.1 C65.1 C66.+ C67.+ IC6.5 IC6.6 IC6.7 LIQUID_RELEASE_SW.1 OLED.2 OLED.3 Q3.2 Q5.2 Q6.2 R1.1 R6.2 R8.2 R10.2 R13.2 R16.2 R21.2 R26.2 R90.2 SOLID_RELEASE_SW.1 U1.28 U2.5 U3.2 U4.1 U5.1 U6.1 U7.4 U7.12 U7.18 X2.2 X-HOMING-SW.1 Y-HOMING-SW.1
VCP: C34.2 IC1.6
VCP1: C41.2 IC2.6
VCP2: C48.2 IC3.6
VCP3: C55.2 IC4.6
VCP4: C62.2 IC5.6
VIB: R69.1 U7.7
VIB_5V [LowPower]: D6.C Q8.3 VIBRATION_.1
VREF: IC1.17 R29.2
VREF1: R29.1 R30.1
VREF2: IC2.17 R36.2
VREF3: R36.1 R37.1
VREF4: IC3.17 R43.2
VREF5: R43.1 R44.1
VREF6: IC4.17 R50.2
VREF7: R50.1 R51.1
VREF8: IC5.17 R57.2
VREF9: R57.1 R58.1
WEIGHT_CLK_1 [HighSpeedSig]: U4.11 X2.9
WEIGHT_CLK_2 [HighSpeedSig]: U5.11 X2.11
WEIGHT_CLK_3 [HighSpeedSig]: U6.11 X2.14
WEIGHT_DATA_1 [HighSpeedSig]: U4.12 X2.8
WEIGHT_DATA_2 [HighSpeedSig]: U5.12 X2.10
WEIGHT_DATA_3 [HighSpeedSig]: U6.12 X2.13
X-HOMING [HighSpeedSig]: R70.1 X2.6 X-HOMING-SW.2
Y-HOMING [HighSpeedSig]: R86.1 X2.7 Y-HOMING-SW.2

## Tracks (layer width: path | path; a pad name or v marks a point on that pad's centre or on a via)
5V_REG  (via drill 0.35, 0.38, 0.51)  (1 unrouted)
  Top 0.203: IC5.15 12.49,22.47 v12.58,22.47 | v9.65,18.8 9.14,18.28 C59.2 | IC2.15 67.1,22.39 v67.31,22.61 | IC3.15 49.51,22.02 v49.51,22.51 | C45.2 45.89,19.13 44.53,19.13 43.69,19.97 v43.69,20.07 v43.69,21.72 42.55,22.86 R54.1 | C52.2 29.72,17.77 30.31,18.36 v30.46,18.36 | R47.1 v52.58,26.16 | v30.99,21.08 31.43,21.52 31.86,21.52 32.16,21.82 IC4.15 | C31.2 80.68,17.93 80.57,17.93 80.17,17.54 v79.73,17.54 | C38.2 63.25,18.32 62.62,18.94 62.62,19.81 62.84,20.03 62.9,20.03 63.25,20.38 R40.1 61.75,20.38 v60.91,21.21 | IC1.15 84.53,21.31 v84.32,21.52
  Top 0.381: C31.2 79.99,18.28 v75.52,22.75
  Top 0.508: VIBRATION_.2 77.49,37.61 v77.72,37.85 | FAN_.2 67.33,36.08 v68.11,36.87 | R33.1 83.57,29.98 83.57,34.29 81.51,36.35 81.51,42.33 v80.07,43.77 | R61.1 17.03,29.96 v16.76,30.23 | Q7.3 40.39,43.02 39.99,42.62 39.99,37.03 42.93,34.09 v42.93,32.94
  GND 0.203: v79.73,17.54 79.73,18.63 82.01,20.91 82.02,20.91 82.58,20.91 83.2,21.52 v84.32,21.52
  Vref 0.203: v43.69,20.07 42.5,18.87 36.83,18.87 36.32,18.36 v30.46,18.36
  Bottom 0.203: v12.58,22.47 12.58,21.73 v9.65,18.8 | v30.99,21.08 30.99,20.74 31.51,20.22 31.51,19.41 v30.46,18.36
  other vias: 14.73,30.23 15.75,30.23 17.78,30.23 18.8,30.23 14.73,31.24 13.72,31.24 13.72,30.23 15.75,31.24 16.76,31.24 17.78,31.24 18.8,31.24
  pour Vref: -1.78,21.08 75.06,21.08 81.77,27.79 81.77,41.64 85.09,44.96 103.89,44.96 103.89,69.34 78.49,69.34 78.49,53.17 67.45,42.13 67.45,37.72 64.27,34.54 -1.78,34.54
5V_SERVO  (via drill 0.33, 0.38, 0.51)
  Top 0.508: v73.91,35.56 75.48,34 76.08,34 76.53,33.54 76.53,31.35 76.8,31.08 78.07,31.08 81.24,27.91 v81.24,26.85
  GND 0.381: v23.74,36.13 23.74,36.34 25.01,37.6 25.77,37.6 v36.06,37.6
  Vref 0.508: v56.07,36.32 50.19,36.32 49.36,35.5 39.4,35.5 37.92,36.98 31.37,36.98 30.59,36.2 30.59,36.12 29.7,35.23 23.36,35.23 22,36.59 v21.32,36.59
  Bottom 0.381: CATCHER_LATCH.2 38.39,34.04 36.06,36.36 v36.06,37.6
  Bottom 0.508: v20.04,33.33 19.82,33.12 19.82,28.33 16.72,25.23 16.72,21.84 16.87,21.69 16.87,18.95 16.18,18.27 16.18,17.26 | SERVO4.2 12.99,9.43 | SOLID_LATCH.2 56.17,36.23 v56.07,36.32 | LIQUID_LATCH.2 73.91,33.71 v73.91,35.56 | v10.92,38.35 10.92,53.09 13.18,55.34 SERVO1.2 | SERVO2.2 13.18,42.64 11.94,41.4 v11.94,38.35
  other vias: 12.95,38.35 13.97,38.35 14.99,38.35 10.92,37.34 11.94,37.34 12.95,37.34 13.97,37.34 14.99,37.34 16,37.34 16,36.32 14.99,36.32 13.97,36.32 12.95,36.32 11.94,36.32 10.92,36.32 16,38.35 13.21,3.56 14.73,3.56 1.02,6.86 12.45,2.29 13.97,2.29 6.35,19.05 7.62,19.05 7.62,17.53 6.35,17.53 6.35,16 11.94,3.56 11.18,2.29 9.91,2.29 10.67,3.56 15.24,2.29 16,3.56 21.34,2.29 22.61,2.29 23.88,2.29 6.1,2.29 4.83,2.29 2.29,2.29 1.02,3.56 1.02,4.83 2.29,16.26 2.29,14.99 2.29,13.72 2.29,12.45 2.29,11.18 2.29,9.91 2.29,8.64 3.56,16.26 3.56,14.99 3.56,13.72 3.56,12.45 3.56,11.18 3.56,9.91 3.56,8.64
  pour Bottom: 7.11,34.54 11.43,34.54 12.7,35.81 16,35.81 16.26,36.07 16.26,38.1 15.75,38.61 6.86,38.61 6.86,34.8
  pour Top: 10.41,34.54 12.45,32.51 24.89,32.51 24.89,37.34 17.78,37.34 16.26,38.86 10.41,38.86
  pour GND: -1.52,-0.25 -1.52,28.96 10.16,28.96 10.16,39.6 15.24,39.6 16.78,38.05 16.78,23.88 12.19,23.88 12.19,16.81 16.62,16.81 16.62,-0.25
  pour Bottom: -1.52,-0.51 -1.52,28.19 19.05,28.19 19.05,10.16 73.66,10.16 80.77,17.27 80.77,29.21 104.14,29.21 104.14,-0.51
12V_REG  (via drill 0.35, 0.38, 0.51)
  Top 0.203: 53.86,16.39 C48.1
  Top 0.305: C41.1 | C43.1 74.6,15.62
  Top 0.381: v84.57,13.97 84.57,16.01 C33.1 84.82,16.51 IC1.22 | C36.1 93.46,17.28 v93.47,17.27 | v23.39,14.73 22.73,14.07 22.73,12.95 | IC4.22 32.5,16.52 C54.1 | v30.3,15.21 30.3,14.9 30.32,14.88 30.32,14.83 C51.1 | IC5.28 17.03,17.28 C62.1 | IC2.22 66.79,16.51 C40.1
  Top 0.508: v65.79,12.45 65.47,12.77 C37.1 66.29,14.79 C40.1 | C30.1 80.71,12.88 C72.+ 80.91,12.05 v81.28,11.68 | C71.+ 60.96,12.18 v60.96,14.22 | C70.+ 43.18,13.45 v43.18,13.72 | C44.1 47.69,12.93 47.66,12.9 47.66,12.86 v47.24,12.45 | C69.+ 22.73,12.95 22.73,13.31 | C36.1 C34.1 | C73.+ 22.49,18.68 v21.84,18.03 21.09,17.28 C64.1 | v29.46,12.45 29.8,12.45 30.38,13.03 30.38,13.18 C51.1 31.42,13.97 v32.4,14.96 32.5,15.06 C54.1 | C57.1 43.69,16.52 v43.69,16 | 10.72,16.32 10.72,15.99 8.52,13.78 C58.1 | IC2.28 C41.1 | C41.1 72.59,16.32 72.59,15.99 73.22,15.36 C43.1 74.6,16.44 v74.68,16.51 | IC1.28 89.92,16.02 v89.92,15.24 | IC3.28 53.32,16.93 53.86,16.39 | C48.1 54.05,16.32 54.05,15.99 54.36,15.68 55.3,15.68 v55.63,15.35 55.63,15.95 55.66,15.99 55.66,16.05 C50.1 57.09,17.47 57.42,17.47 57.47,17.53 v58.42,17.53 | IC3.22 50.32,16.91 49.16,15.76 C47.1 48.02,15.51 v47.01,15.51 | IC4.28 36.97,17.66 C55.1 36.97,15.87 v37.59,15.24 | C62.1 17.03,16.21 v16.67,15.85 | IC5.22 12.18,16.51 C61.1
  other vias: 8.13,13.78 32.77,1.27 34.04,1.27 35.31,1.27 36.58,1.27 36.58,2.54 35.31,2.54 34.04,2.54 32.77,2.54 48.01,2.54 48.01,1.27 50.55,1.27 50.55,2.54 49.28,2.54 49.28,1.27 59.44,1.27 60.71,1.27 61.98,1.27 61.98,2.54 60.71,2.54 59.44,2.54 68.33,1.27 69.6,1.27 72.14,1.27 70.87,1.27 72.14,2.54 70.87,2.54 69.6,2.54 68.33,2.54 78.49,1.27 79.76,1.27 81.03,1.27 81.03,2.54 79.76,2.54 78.49,2.54 88.65,1.27 91.19,1.27 89.92,1.27 92.46,1.27 91.19,2.54 89.92,2.54 88.65,2.54
  pour Vref: -1.27,19.56 -1.27,0 104.14,0 104.14,43.73 85.75,43.73 83.01,40.99 83.01,27.19 75.38,19.56
  pour Top: 103.89,43.76 85.87,43.76 82.92,40.81 82.92,26.67 -0.25,26.67 -1.52,25.4 -1.52,0 -0.25,-1.27 102.62,-1.27 103.89,0
!RESET
  Bottom 0.203: R10.1 60.78,41.02 61.74,40.06 U7.23
A+_1  (via drill 0.35)
  GND 0.203: v59.94,49.78 60.33,49.78 60.92,49.2 62.11,49.2 62.77,49.86 67.22,49.86 73.91,56.54 76.1,56.54 v76.71,57.15
  Bottom 0.305: WEIGHT3.4 v76.71,57.15 | R9.1 58.84,49.78 v59.94,49.78
A+_2  (via drill 0.35)
  GND 0.203: v60.88,57.23 58.43,54.79 47.57,54.79 v47.39,54.61
  Bottom 0.203: WEIGHT2.4 61.47,57.82 v60.88,57.23 | v47.39,54.61 R18.1
A+_3  (via drill 0.35)
  GND 0.203: v29.04,58.5 27.07,56.54 v25.85,56.54
  Bottom 0.203: WEIGHT1.4 46.23,61.21 45.47,61.98 37.85,61.98 36.45,60.58 31.11,60.58 v29.04,58.5 | R23.1 25.85,56.02 v25.85,56.54
A-_1  (via drill 0.35)
  Vref 0.203: v57.15,46.51 65.01,46.51 65.83,47.32 66.7,47.32 v68.11,48.73
  Bottom 0.203: v68.11,48.73 71.27,48.73 72.17,49.63 72.17,54.44 73.15,55.42 73.75,55.42 v74.19,55.86
  Bottom 0.305: WEIGHT3.3 74.71,57.82 74.37,57.49 74.37,56.04 v74.19,55.86 | R5.1 57.15,44.62 v57.15,46.51
A-_2  (via drill 0.35, 0.35 pad 0.51)
  GND 0.203: v40.07,55.71 41.66,57.29 41.66,57.47 43.63,59.44 59.43,59.44 61.13,61.13 v61.13,61.39
  Bottom 0.203: WEIGHT2.3 59.47,59.89 60.97,61.39 v61.13,61.39 | R17.1 39.54,55.17 v40.07,55.71
A-_3  (via drill 0.35)
  GND 0.203: v21.34,57.05 25.41,61.13 v41.66,61.13
  Bottom 0.203: R22.1 20.07,50.42 18.6,51.89 18.6,56.56 19.02,56.98 21.26,56.98 v21.34,57.05 | WEIGHT1.3 44.07,59.4 44.07,60.89 43.73,61.24 41.76,61.24 v41.66,61.13
AVDD_1  (via drill 0.35, 0.51)
  Top 0.203: v74.93,50.55 74.42,51.05 74.42,53.85 71.37,56.9 v71.12,56.9 | v61.18,56.27 63.64,56.27 v64.39,57.02
  Bottom 0.203: C9.1 75.26,50.55 v74.93,50.55 | WEIGHT3.1 70.71,57.31 v71.12,56.9 70.87,57.15 68.33,57.15 66.64,55.46 C14.1 66.64,54.75 65.52,55.86 65.52,55.89 v64.39,57.02 | v61.18,56.27 61.18,55.98 L1.1
AVDD_2  (via drill 0.35)
  Top 0.203: v49.78,45.72 48.28,44.21 v48.28,41.27
  Bottom 0.203: v49.78,45.72 50.13,45.72 C21.1 50.18,49.05 L2.1 53.42,57.85 53.42,58.45 54.22,59.25 WEIGHT2.1
  Bottom 0.305: C17.1 48.34,41.21 v48.28,41.27
AVDD_3
  Bottom 0.203: C24.1 36.58,40.31 36.58,44.24 35.86,44.96 33.95,44.96 C28.1 33.87,47.24 34.61,47.24 35.05,47.69 35.05,49.23 33.8,50.49 33.8,53.62 32.81,54.61 L3.1 32.63,56.11 33.2,56.11 33.87,56.79 36.86,56.79 39.32,59.25 WEIGHT1.1
BRA
  Top 0.203: IC1.23 86.12,16.86 85.86,16.61 85.7,16.61 85.09,16 85.09,14.44 85.27,14.26 85.27,13.68 85.02,13.44 R28.2
BRA1  (via drill 0.35)
  Top 0.203: IC2.23 68.6,17.11 v67.43,15.95 | R35.2 72.96,14.73 v71.12,14.73
  GND 0.203: v67.43,15.95 69.9,15.95 v71.12,14.73
BRA2  (via drill 0.35, 0.38)
  Top 0.203: R42.2 54.58,13.97 v53.57,14.99 | IC3.23 50.82,15.76 v49.78,14.73
  GND 0.203: v49.78,14.73 53.31,14.73 v53.57,14.99
BRA3  (via drill 0.35)
  Top 0.203: IC4.23 34.31,16.83 v33.61,16.14 | v39.73,16.36 39.73,15.28 R49.2
  Bottom 0.203: v33.61,16.14 33.74,16.26 34.8,16.26 37.32,18.78 38.16,18.78 38.59,18.34 38.59,17.49 v39.73,16.36
BRA4  (via drill 0.35, 0.38)
  Top 0.203: R56.2 20.83,13.21 v20.07,12.45 | IC5.23 13.99,17.23 v11.89,15.13
  GND 0.203: v20.07,12.45 18.56,12.45 18.32,12.21 14.81,12.21 v11.89,15.13
BRB
  Top 0.203: IC1.27 88.14,17.3 88.14,16.76 88.39,16.51 88.6,16.51 89.17,15.94 89.17,14.71 89.92,13.97 R27.2
BRB1  (via drill 0.35)
  Top 0.203: IC2.27 70.61,17.8 70.61,17.03 v70.95,16.69 | R34.2 60.96,18.22 v60.96,19.3
  GND 0.203: v70.95,16.69 63.57,16.69 v60.96,19.3
BRB2
  Top 0.203: IC3.27 52.82,12.62 R41.2
BRB3
  Top 0.203: IC4.27 36.31,15.41 R48.2
BRB4  (via drill 0.35)
  Top 0.203: R55.2 v18.03,12.89 | IC5.27 15.99,14.4 15.76,14.17 15.76,13.16 v15.48,12.89
  GND 0.203: v18.03,12.89 v15.48,12.89
CC1
  Top 0.203: J2.A5 55.65,60.92 55.65,58.2 56.9,56.96 R63.2
CC2  (via drill 0.35)
  Top 0.203: J2.B5 52.61,59.18 52.88,58.91 v52.88,56.34 | R62.2 58.85,54.35 58.85,54.39 58.14,55.09 v58.14,55.47
  Vref 0.203: v52.88,56.34 53.94,56.34 54.07,56.21 57.4,56.21 v58.14,55.47
CLK_1
  Top 0.203: IC1.13 86.11,22.33 86.11,23.12 R31.2
CLK_2  (via drill 0.35)
  Top 0.203: R38.2 v73.91,22.85 v73.91,22.86 | v69.09,24.13 68.6,23.64 IC2.13
  Bottom 0.203: v69.09,24.13 69.85,24.89 73.41,24.89 73.91,24.38 v73.91,22.86
CLK_3  (via drill 0.35)
  Top 0.203: R45.2 55.62,24.64 v54.36,24.64 | v50.82,23.9 v50.82,23.89 IC3.13
  Bottom 0.203: v50.82,23.9 51.75,23.9 52.37,23.27 52.99,23.27 v54.36,24.64
CLK_4
  Top 0.203: R52.2 33.75,24.92 33.75,24.52 34.31,23.96 IC4.13
CLK_5  (via drill 0.35)
  Top 0.203: R59.2 18.8,24.62 v18.78,24.62 | IC5.13 14.05,22.88 14.05,23.33 14.22,23.5 v14.22,25.4
  GND 0.203: v14.22,25.4 15.23,26.4 17,26.4 v18.78,24.62
CPI
  Top 0.203: IC1.5 90.92,20.31 91.44,20.83 C35.2
CPI1
  Top 0.203: IC2.5 73.41,20.82 C42.2
CPI2
  Top 0.203: IC3.5 C49.2
CPI3
  Top 0.203: C56.2 IC4.5
CPI4
  Top 0.203: IC5.5 17.55,20.75 18.17,20.75 18.27,20.66 18.83,20.66 19.16,20.98 19.47,20.98 C63.2
CPO
  Top 0.203: IC1.4 C35.1
CPO1
  Top 0.203: IC2.4 72.63,20.32 74.4,18.55 C42.1
CPO2
  Top 0.203: IC3.4 56.06,20.32 56.56,19.82 C49.1
CPO3
  Top 0.203: C56.1 40.12,19.82 39.62,20.32 IC4.4
CPO4
  Top 0.203: IC5.4 18.03,20.32 18.1,20.25 19.74,20.25 C63.1
DIR_1  (via drill 0.35)
  Top 0.203: v61.42,34.28 61.85,33.85 62.49,33.85 63.25,33.09 63.25,29.21 63.94,28.52 72.48,28.52 75.76,25.23 75.76,23.97 80.57,19.16 81.49,19.16 81.63,19.31 IC1.19
  Bottom 0.203: U7.13 61.74,34.94 61.42,34.61 v61.42,34.28
DIR_2  (via drill 0.35)
  Top 0.203: v60.71,35.56 60.71,33.91 60.46,33.67 60.46,30.41 60.64,30.23 60.95,30.23 62.09,29.09 v62.09,22.31 | IC2.19 67.03,19.75 66.58,19.75 66.56,19.73 v65.5,19.73
  Vref 0.203: v62.09,22.31 62.09,21.4 63.74,19.75 64.55,19.75 64.57,19.73 v65.5,19.73
  Bottom 0.203: U7.14 60.73,35.53 v60.71,35.56
DIR_LIQUID  (via drill 0.35, 0.38)
  Top 0.203: IC5.19 11.68,19.81 11.43,19.56 v11.43,19.3 | IC3.19 48.58,19.81 48.07,19.3 v48.01,19.3 | v31.37,17.65 31.37,18.92 32.26,19.81 IC4.19 | v66.82,40.06 66.47,39.71 66.47,39.09 65.83,38.45 59.65,38.45 58.31,37.11 58.31,31.75 55.84,29.28 45.74,29.28 v45.47,29.01
  Vref 0.203: v11.43,19.3 13.04,19.3 13.7,18.64 16.28,18.64 16.68,19.05 27.48,19.05 28.86,17.67 31.36,17.67 v31.37,17.65 32.08,16.94 33.81,16.94 33.99,16.76 39.17,16.76 39.45,17.04 44.17,17.04 46.43,19.3 v48.01,19.3
  Bottom 0.203: U7.2 66.34,38.31 66.82,38.79 v66.82,40.06 | v45.47,29.01 45.47,25 45.23,24.75 45.23,19.59 45.69,19.13 46.26,19.13 46.43,19.3 v48.01,19.3
DTR  (via drill 0.35)
  Top 0.203: R15.1 45.74,62.81 Q2.2 45.79,62.5 v46.91,62.5 | v62.1,61.34 62.1,61.24 59.94,59.08 59.94,56.96 60.5,56.41 60.5,53.34 60.06,52.91 59.76,52.91 v59.47,52.61 | IC6.23 59.47,50.28 59.66,50.47 59.68,50.47 v60.46,51.25
  GND 0.203: v60.46,51.25 59.47,52.24 v59.47,52.61
  Bottom 0.203: v46.91,62.5 47.73,62.5 49.7,60.52 53.32,60.52 56.65,63.85 59.93,63.85 62.1,61.67 v62.1,61.34
EN  (via drill 0.35)
  Top 0.203: R7.1 44.62,55.79 v43.43,54.61 | v40.39,53.34 40.78,52.95 40.79,52.95 41.34,52.4 U2.3
  GND 0.203: v43.43,54.61 42.16,53.34 v40.39,53.34
EN_LIQUID_1  (via drill 0.35, 0.38)
  Top 0.203: IC3.2 55.61,19.32 v55.88,19.05 | v55.37,25.91 55.12,26.16 R47.2
  GND 0.203: v53.08,33.02 55.37,30.73 v55.37,25.91
  Bottom 0.203: v55.88,19.05 55.88,21.04 56.06,21.22 56.06,25.22 v55.37,25.91 | U7.20 59.51,38.31 58.44,39.37 55.63,39.37 55.18,38.93 55.18,32.46 54.79,32.08 53.54,32.08 53.36,32.25 53.36,32.74 v53.08,33.02
EN_LIQUID_2  (via drill 0.35)
  Top 0.203: R61.2 18.8,25.4 v19.05,25.65 | IC5.2 20.07,19.32 20.69,19.94 20.69,20.38 20.87,20.56 21.31,20.56 v21.59,20.84
  Vref 0.203: v19.05,25.65 21.59,23.11 v21.59,20.84 | v59.44,39.37 57.39,37.32 57.39,36.63 55.33,34.58 20.59,34.58 v20.52,34.65
  Bottom 0.203: U7.21 60.1,38.71 v59.44,39.37 | v20.52,34.65 20.52,33.92 20.8,33.65 20.8,33.01 20.38,32.6 20.38,26.99 v19.05,25.65
EN_LIQUID_3  (via drill 0.35, 0.51)
  Top 0.203: v41.42,20.32 41.07,19.96 41.07,19.38 40.48,18.8 38.78,18.8 38.25,19.32 IC4.2 | v39.12,22.35 39.89,22.35 R54.2 40.39,23.63 41.25,24.49 v43.45,24.49 | v52.8,31.61 52.51,31.32 52.51,30.41 51.79,29.69 45.18,29.69 44.47,28.97 v44.47,28.65
  Bottom 0.203: v39.12,22.35 39.39,22.35 v41.42,20.32 | v52.8,31.61 52.81,31.59 56.98,31.59 57.17,31.79 57.17,36.21 56.36,37.02 56.25,37.02 55.72,37.55 55.72,38.05 56.49,38.82 58.46,38.82 59.37,37.91 U7.19 | v44.47,28.65 44.47,25.5 v43.45,24.49
EN_XY  (via drill 0.35, 0.38)
  Top 0.203: v90.17,25.15 89.92,25.4 R33.2 89.15,26.2 89.33,26.39 89.33,28.22 88.93,28.62 88,28.62 84.12,32.5 84.12,34.52 82.4,36.25 v82.4,37.12 | IC1.2 90.61,18.81 v90.93,19.14 | R40.2 63.63,19.05 v64.26,19.05 | IC2.2 72.63,19.32 74.05,17.89 75.14,17.89 75.36,18.11 75.36,18.21 v75.69,18.54
  GND 0.203: v64.26,19.05 64.26,20.55 67.31,23.59 67.31,37.85 v65.79,39.37
  Vref 0.203: v64.26,19.05 67.9,19.05 68.31,18.64 70.89,18.64 70.97,18.73 75.5,18.73 v75.69,18.54 75.69,19.75 76.45,20.51 76.45,21.5 81.1,26.15 81.53,26.15 82.41,27.03 82.41,37.14 v82.4,37.12
  Bottom 0.203: v90.17,25.15 90.93,24.38 v90.93,19.14 | U7.1 65.18,39.37 v65.79,39.37
FAN  (via drill 0.35)
  Top 0.203: v64.19,34.51 65.44,34.51 66.52,35.59 66.52,37.17 67.31,37.96 67.31,39.43 67.76,39.88 67.98,39.88 R68.1
  Bottom 0.203: U7.8 63.74,34.96 v64.19,34.51
FAN_5V
  Top 0.305: FAN_.1 69.33,37.07 70.87,38.61 D5.C 72.76,41.53 Q8.6
GND  (via drill 0.25, 0.3, 0.35, 0.38, 0.51)  (12 unrouted)
  Top 0.203: R31.1 85.61,24.62 C32.1 84.84,24.63 R32.1 84.49,23.78 84.38,23.78 83.5,22.9 R29.3 | R53.1 40.14,25.15 39.46,25.15 38.53,26.08 35.62,26.08 35.15,25.61 35.15,25.49 C53.1 | C46.1 48.27,23.87 v48.51,23.62 | IC4.18 v34.29,20.32 | IC4.3 37.74,19.88 37.3,19.88 36.86,20.32 IC4.TP | IC5.18 v13.97,20.32 | IC5.3 17.42,19.88 16.98,19.88 16.54,20.32 IC5.TP | IC2.18 v68.58,20.32 | IC2.3 72.03,19.88 71.59,19.88 71.15,20.32 IC2.TP | IC1.18 v86.11,19.81 | IC1.3 89.56,19.38 89.11,19.38 88.66,19.83 v87.12,19.83 | IC6.2 57.7,51.59 57.7,52.02 57.92,52.24 58.89,52.24 59.19,51.93 59.75,51.93 59.89,52.07 60.71,52.07 | 60.71,52.07 U3.5 | 60.71,52.07 v60.71,52.26 | v16,21.34 16,21.39 16.92,22.31 16.92,22.57 v17.78,23.43 18.88,23.43 19.61,22.7 19.72,22.7 R59.1 20.41,22.7 20.53,22.7 20.75,22.93 20.75,23.79 20.07,24.47 R60.1 | R50.3 32.13,23.14 32.13,24.73 32.27,24.86 R52.1 32.1,25.4 v31.89,25.61 | D3.C 14.27,63.5 v13.72,63.5 | RESET.A' 24.09,64.77 v22.61,64.77 | D8.C 30.91,43.18 31.82,42.28 32.49,42.28 33.02,41.74 v33.02,40.89 | ROTARY_SWITCH.6 54.62,42.93 v54.62,40.96
  Top 0.305: IC3.18 v50.8,20.32 | IC3.3 54.3,19.81 53.78,19.81 53.28,19.3 v52.83,19.3 | C58.2 7.23,14.79 6.6,14.16 6.6,9.65 v7.11,9.14
  Top 0.381: v83.06,15.49 83.06,12.26 R28.1 | R55.1 18.29,9.72 v18.29,8.38 | C43.2 75.63,15.34 R35.1 | OLED.1 74.3,60.58 v75.44,61.72 | v27.43,18.03 28.69,16.77 C52.1 | C52.1 29.46,14.16 C51.2 | C54.2 30.23,16 C52.1
  Top 0.508: R57.3 12.3,23.62 v12.45,23.62 12.45,25.4 13.46,26.42 C60.1 | v34.54,11.18 34.54,11.75 R48.1 | C54.2 | 45.63,14.13 44.77,14.99 R49.1 41.34,16 42.91,17.58 43.24,17.58 C57.2 | 45.63,14.13 C44.2 | 45.63,14.13 v45.63,16.17 C45.1 47.26,16.76 C47.2 | R42.1 57.85,13.7 56.81,12.66 56.6,12.66 v55.88,11.94 54.54,11.94 R41.1 | v63.75,12.45 63.57,12.45 C37.2 63.57,14.79 C40.2 64.02,16.51 C38.1 | R35.1 75.95,13.65 v75.95,12.45 | C30.2 78.23,15.81 v78.23,16.76 | C31.1 82.3,17.28 C33.2 83.07,15.5 v83.06,15.49 | R38.1 75.43,21.09 v75.69,20.83 | C32.1 85.1,25.91 v84.65,25.91 | C36.2 92.96,18.28 v93.47,18.8 | R27.1 94.49,12.89 v94.49,11.93 | C6.2 43.35,52.17 R12.1 | U2.2 40.39,51.05 40.64,50.8 R12.1 | R12.1 43.28,50.73 v41.36,50.73 | C4.2 35.63,55.15 C1.2 35.63,50.9 C7.2 35.73,48.36 C8.2 35.37,48.01 v34.29,48.01 | R36.3 66.48,23.19 66.48,24.31 v66.55,24.38 | v66.55,25.91 67.32,25.91 R39.1 67.83,25.8 68.31,26.28 69.34,26.28 70.23,25.4 C39.1 | R43.3 47.94,23.04 v48.51,23.62 | R50.3 31.5,22.5 | R53.1 38.61,24.9 v38.4,25.12 | v76.71,43.43 75.95,42.67 D6.A 74.14,41.64 Q8.4 | C59.1 9.14,17.28 C61.2 8.96,16.51 C58.2 | v19.05,18.29 C64.2 | 20.07,24.76 R60.1 | 20.21,22.5 R59.1 | C50.2 57.91,19.3 57.91,21.34 | 57.91,21.34 R45.1 | R46.1 57.91,23.88 57.91,21.34 | 57.91,21.34 v57.98,21.34 | C10.2 62.3,47.94 v61.98,48.26 | ROTARY_SWITCH.2 v58.44,42.29 | 54.37,41.21 v54.62,40.96 | C65.2 v54.46,53.76 | J2.GND2 51.13,59.01 v50.55,58.42 | R62.1 59.18,55.71 v59.18,57.15 59.18,59.36 J2.GND | R65.1 68.41,56.39 v69.09,56.39 | D5.A 71.63,42.41 v72.19,42.41 | D1.C D2.C | Q8.1 72.76,36.74 v72.15,36.13 | 87.62,19.33 v87.12,19.83 | 70.1,19.82 IC2.TP | 52.32,19.82 IC3.TP
  Top 0.508: 35.81,19.82 IC4.TP | 15.49,19.82 IC5.TP | R34.1 58.49,16.07 v58.42,16 | v77.98,6.35 78.98,6.35 C72.- 80.78,6.35 v81.79,6.35 | v58.93,6.1 59.68,6.1 C71.- 62.22,5.87 v63.22,5.87 | C51.2 28.19,15.05 v28.19,15.24 | C73.- 27.43,19.42 v27.43,18.03 | R56.1 19.24,15.68 v19.05,15.49 | RESET.A' RESET.A | X2.1 6.1,43.65 v6.1,45.72 | X2.15 23.23,46.37 v22.57,47.03 | X2.38 6.1,60.65 v6.1,62.23
  GND 0.508: R63.1 56.9,53.34
  Vref 0.508: v19.05,15.49 18.44,14.88 18.44,14.86 17.91,14.33 12.29,14.33 v7.11,9.14
  Bottom 0.203: C20.1 36.92,46.14 v36.32,46.74 | v88.14,18.8 88.07,18.86 SERVO12.3 87.92,18.8 v87.12,18.8 | R4.2 26.67,18.83 v25.51,17.67 | U7.26 62.94,41.57 63.74,42.38 65.61,42.38 66.42,43.18 C13.1 | U7.3 68.52,37.91 70.3,36.13 v72.15,36.13 | C3.2 66.72,30.76 v66.63,30.67 | U1.25 U1.24 | U7.17 62.14,37.11 U7.29 | 64.94,53.14 C14.2 64.69,53.59 v64.69,54.5 | C12.2 62.83,53.92 v62.47,54.28 | U7.10 62.94,37.11 | SERVO2.3 15.57,43.45 15.8,43.45 16.92,42.33 | 16.92,42.33 v18.8,42.33 C27.1 | C26.2 C28.2 | 16.92,42.33 16.68,42.33 v16.26,41.91 | SERVO1.3 15.97,57.34 v16.26,57.05 | 31.5,46.57 C28.2 | C28.2 31.33,46.4 30.53,46.4 30.13,46 30.13,45.94 29.28,45.09 29.26,45.09 | U6.14 29.26,45.09 | U6.5 23.16,47.62 v22.57,47.03 | U4.16 U4.15 | U4.15 68.96,50.55 66.67,48.26 v61.98,48.26 | U5.16 U5.15 U5.14 | R26.1 33.87,40.89 v33.02,40.89 31.42,42.49 30.61,42.49 30.55,42.55 29.98,42.55 29.97,42.55 U6.16 U6.15 29.22,45.04 29.26,45.09 | U4.15 U4.14 | R21.1 54.62,42.06 v54.62,40.96 | R16.1 73.83,52.82 C5.2
  Bottom 0.305: U1.25 24.14,31.2 v24.17,31.24 | v25.42,36.75 25.42,35.8 24.93,35.31 24.93,34.81 U1.5 U1.4 U1.3 U1.2 | 62.94,37.11 U7.29 | C3.2 65.44,30.91 C22.2 C15.2 | C28.2 32.93,48.01 v34.29,48.01
  Bottom 0.381: v12.45,23.62 12.01,24.05 12.01,25 11.94,25.08 11.94,29.72 v9.4,32.26
  Bottom 0.508: SERVO6.3 33.85,10.48 v34.54,11.18 | SERVO8.3 55.88,9.11 v55.88,10.16 | SEROVO9.3 68.14,10.35 v68.07,10.41 | SERVO10.3 78.49,9.36 v78.49,9.91 | v34.29,48.01 34.12,47.84 | SERVO11.3 88.65,5.5 v88.65,4.83 | R11.1 76.45,43.18 v76.71,43.43 | v7.11,9.14 10.12,9.14 SERVO4.3 | 18.73,17.97 v19.05,18.29 | C2.2 v17.78,23.43 | R24.1 v20.07,36.07 | C23.2 25.42,37.43 v25.42,36.75 | C24.2 30.53,38.73 v30.53,39.46 | WEIGHT1.5 49.06,58.42 v50.55,58.42 | WEIGHT1.2 42.23,57.34 v42.42,57.15 | WEIGHT2.5 63.47,60.67 v64.14,61.34 | WEIGHT3.5 78.71,60.42 v79.25,60.96 | WEIGHT3.2 72.71,60.77 v73.41,61.47 | C5.2 C9.2 | 65.28,45.59 U4.5 65.15,44.73 65.99,43.89 65.99,43.82 C13.1 66.75,43.18 v67.67,42.26 | U5.14 48.99,45.09 v50.09,43.99 | v53.09,48.51 52.49,49.11 C21.2 C19.2 | U5.5 42.04,47.62 40.55,46.14 C20.1 | v72.15,36.13 72.15,33.88 LIQUID_LATCH.3 | v54.62,40.96 54.62,34.14 SOLID_LATCH.3 50.22,37.63 C16.2 | R19.1 40.55,35.81 43.69,35.81 45.14,37.26 C17.2 45.14,41.1 v45.25,41.1 | C24.2 31.17,36.65 v31.75,36.07 | U1.14 30.64,37.58 C24.2 | CATCHER_LATCH.3 35.31,34.76 v35.31,35.56 | 57.47,58.36 WEIGHT2.2 58.51,58.21 58.51,57.76 58.78,57.49 58.84,57.49 v59.18,57.15 | SERVO3.3 13.97,18.38 v13.97,19.3 | U4.14 67.69,51.6 69.09,53 v69.09,56.39 | v38.4,25.12 33.33,25.12 33.16,25.28 32.22,25.28 v31.89,25.61
  other vias: 75.69,17.02 13.97,21.34 14.99,21.34 16,20.32 14.99,20.32 14.99,19.3 16,19.3 34.29,21.34 35.31,21.34 36.32,21.34 36.32,20.32 35.31,20.32 34.29,19.3 35.31,19.3 36.32,19.3 50.8,21.34 50.8,19.3 51.82,19.3 52.83,20.32 52.83,21.34 51.82,21.34 51.82,20.32 69.6,20.32 69.6,21.34 70.61,21.34 70.61,20.32 70.61,19.3 69.6,19.3 68.58,19.3 68.58,21.34 88.11,19.84 86.11,18.8 86.11,20.83 22.35,8.38 23.11,8.38 23.11,7.37 22.35,7.37 22.35,6.35 23.11,6.35 41.4,8.38 42.16,8.38 42.16,7.37 41.4,7.37 42.16,6.35 41.4,6.35 45.21,8.38 45.21,9.14 45.21,7.62 78.49,46.99 79.25,46.99 79.25,45.97 78.49,45.97 78.49,44.96 79.25,44.96 71.12,46.99 71.12,45.97 71.12,44.96 56.9,49.53 56.9,48.51 55.88,48.51 55.88,49.53 55.88,50.55 56.9,50.55 73.15,49.28 73.15,50.29 73.15,51.56 73.15,52.58 46.74,44.23 7.37,33.27 7.37,32.26 7.37,31.24 7.37,30.23 8.38,33.27 8.38,32.26 9.4,33.27 62.56,37.57 61.62,37.54 63.46,37.55 11.18,54.61 12.45,53.34 12.45,52.07 12.45,50.8 12.45,49.53 13.72,49.53 13.72,50.8 13.72,52.07 16.26,52.07 16.26,50.8 16.26,53.34 16.26,54.61 56.9,53.76
  pour GND: -2.54,69.85 -2.54,29.97 9.14,29.97 9.14,40.64 15.75,40.64 17.78,38.61 17.78,22.35 13.72,22.35 13.72,18.03 17.78,18.03 17.78,-0.25 103.89,-0.25 103.89,69.85
  pour Bottom: 7.11,33.78 7.11,29.97 7.62,29.46 11.94,29.46 12.19,29.72 12.19,33.78
  pour Bottom: 53.09,54.1 55.12,52.07 55.12,48.77 55.12,48.26 55.88,47.5 57.4,47.5 57.66,47.75 57.66,54.86 56.9,55.63 53.59,55.63 53.09,55.12 53.09,54.86
GPIO0  (via drill 0.35)
  Top 0.203: Q2.3 47.84,65.19 47.22,65.81 35.08,65.81 v32.77,63.5 | v27.24,60.3 26.97,60.57 X2.25
  Vref 0.203: v32.77,63.5 29.57,60.3 v27.24,60.3
LRSW  (via drill 0.35)
  Top 0.152: R66.1 46.74,38.1 | 46.74,38.1 v46.74,37.82 | LIQUID_RELEASE_SW.2 57.17,37.44 57.3,37.57 57.3,38.12 56.91,38.5 47.14,38.5 46.74,38.1
  Top 0.203: X2.16 24.59,47.12 24.8,47.12 27.49,44.44 v27.49,39.37
  GND 0.152: v27.49,39.37 27.77,39.37 28.42,38.72 30.84,38.72 31.49,39.37 36.25,39.37 37.39,40.51 44.04,40.51 v46.74,37.82
MS1_LIQUID  (via drill 0.35)